# EAGLE board Qwiic-OpenLog-Panel (EAGLE 9.2.0), part 1 of 4
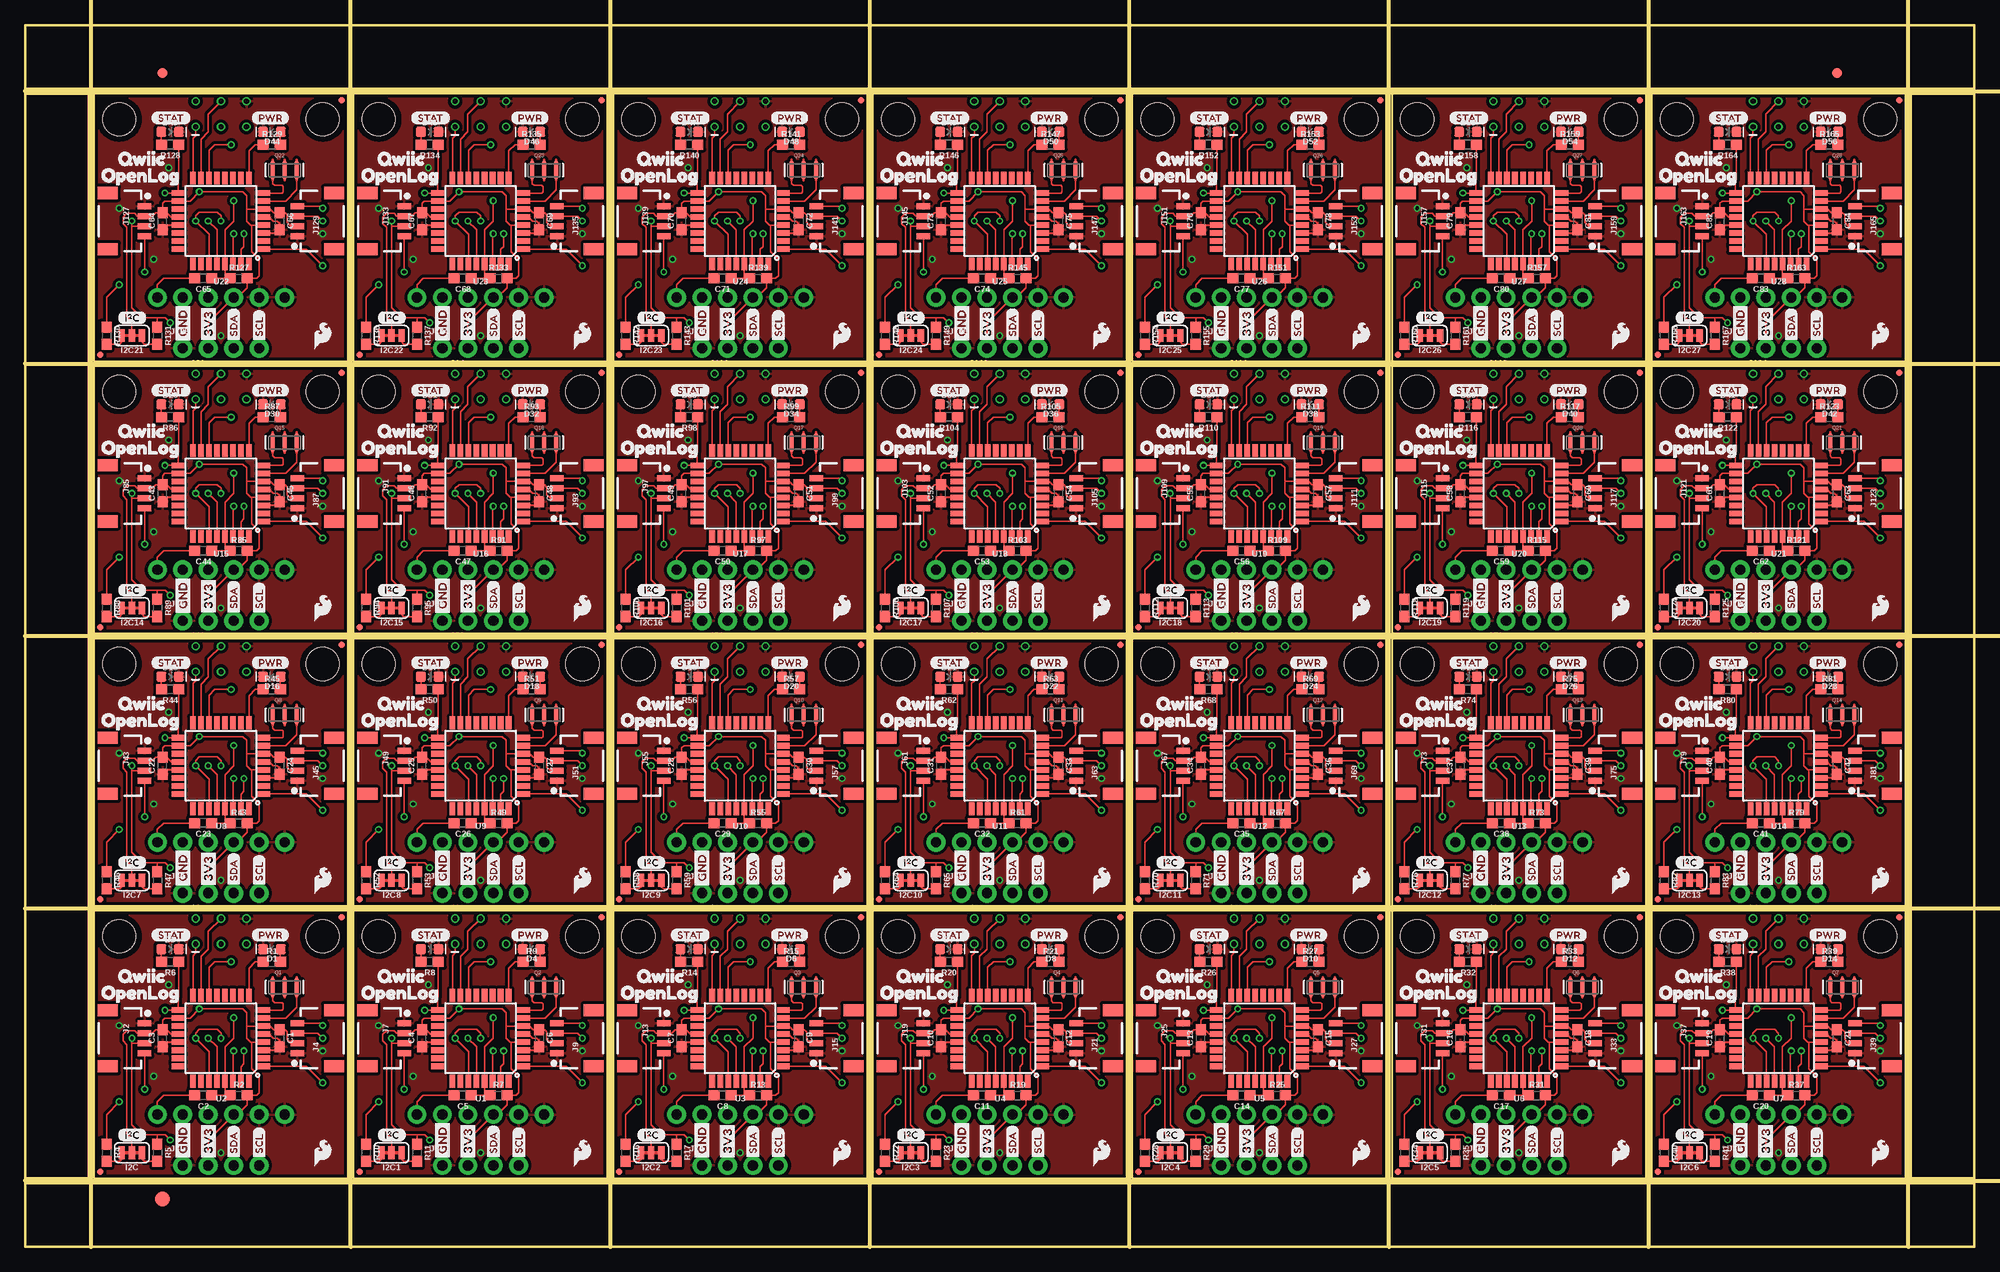
[diagram p0: board, top side]
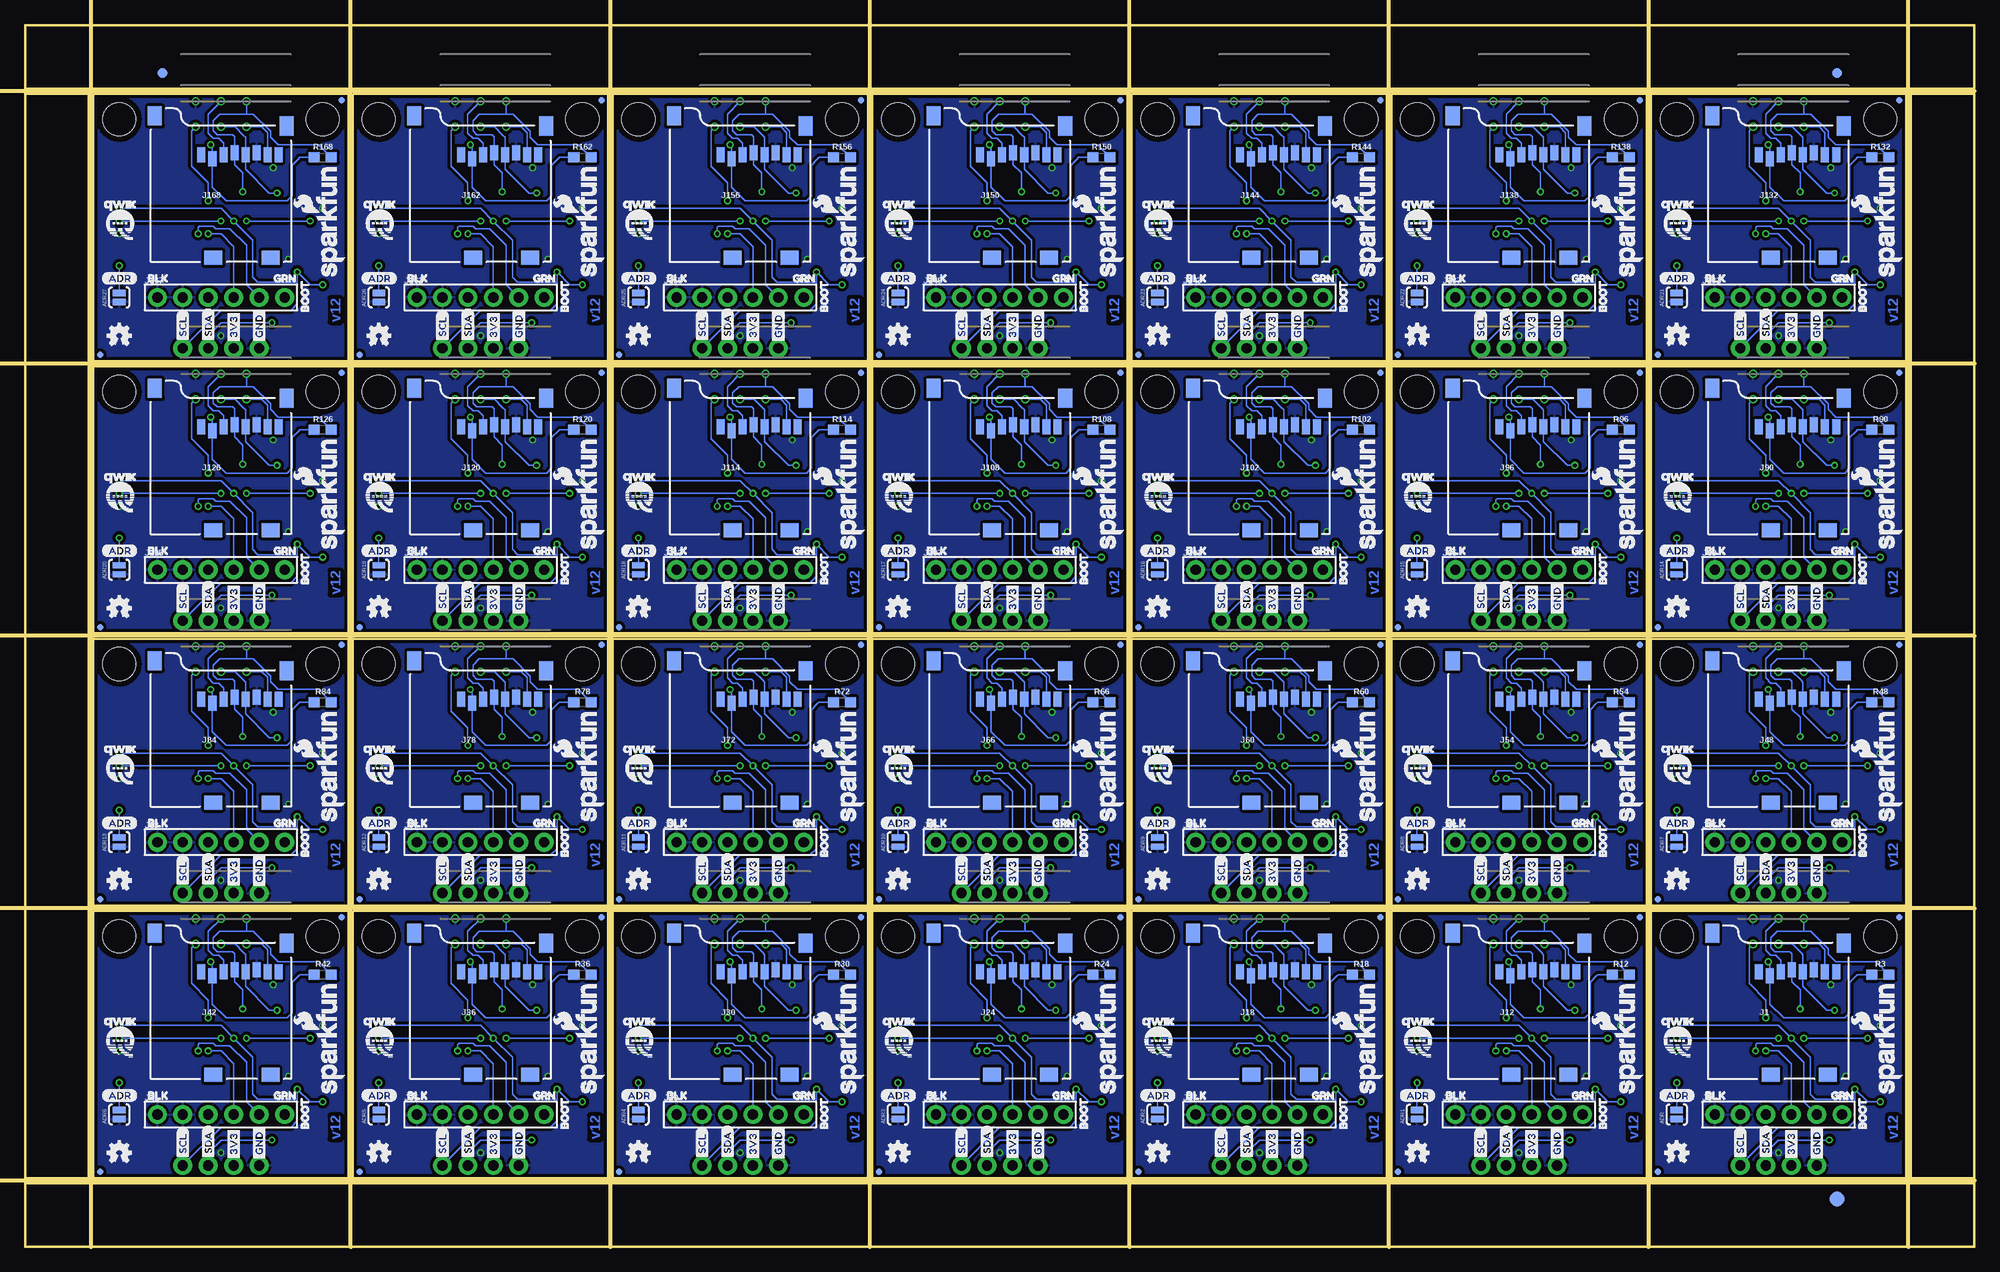
[diagram p1: board, bottom side, seen from below]

Size 194.56 x 121.92 mm. Coordinates in mm from the lower left corner, seen from the top.
Outline: 32.26,6.86 32.26,33.53 6.86,33.53 6.86,6.86 32.26,6.86
Outline: 58.17,6.86 58.17,33.53 32.77,33.53 32.77,6.86 58.17,6.86
Outline: 84.07,6.86 84.07,33.53 58.67,33.53 58.67,6.86 84.07,6.86
Outline: 109.98,6.86 109.98,33.53 84.58,33.53 84.58,6.86 109.98,6.86
Outline: 135.89,6.86 135.89,33.53 110.49,33.53 110.49,6.86 135.89,6.86
Outline: 161.8,6.86 161.8,33.53 136.4,33.53 136.4,6.86 161.8,6.86
Outline: 187.71,6.86 187.71,33.53 162.31,33.53 162.31,6.86 187.71,6.86
Outline: 32.26,34.04 32.26,60.71 6.86,60.71 6.86,34.04 32.26,34.04
Outline: 58.17,34.04 58.17,60.71 32.77,60.71 32.77,34.04 58.17,34.04
Outline: 84.07,34.04 84.07,60.71 58.67,60.71 58.67,34.04 84.07,34.04
Outline: 109.98,34.04 109.98,60.71 84.58,60.71 84.58,34.04 109.98,34.04
Outline: 135.89,34.04 135.89,60.71 110.49,60.71 110.49,34.04 135.89,34.04
Outline: 161.8,34.04 161.8,60.71 136.4,60.71 136.4,34.04 161.8,34.04
Outline: 187.71,34.04 187.71,60.71 162.31,60.71 162.31,34.04 187.71,34.04
Outline: 32.26,61.21 32.26,87.88 6.86,87.88 6.86,61.21 32.26,61.21
Outline: 58.17,61.21 58.17,87.88 32.77,87.88 32.77,61.21 58.17,61.21
Outline: 84.07,61.21 84.07,87.88 58.67,87.88 58.67,61.21 84.07,61.21
Outline: 109.98,61.21 109.98,87.88 84.58,87.88 84.58,61.21 109.98,61.21
Outline: 135.89,61.21 135.89,87.88 110.49,87.88 110.49,61.21 135.89,61.21
Outline: 161.8,61.21 161.8,87.88 136.4,87.88 136.4,61.21 161.8,61.21
Outline: 187.71,61.21 187.71,87.88 162.31,87.88 162.31,61.21 187.71,61.21
Outline: 32.26,88.39 32.26,115.06 6.86,115.06 6.86,88.39 32.26,88.39
Outline: 58.17,88.39 58.17,115.06 32.77,115.06 32.77,88.39 58.17,88.39
Outline: 84.07,88.39 84.07,115.06 58.67,115.06 58.67,88.39 84.07,88.39
Outline: 109.98,88.39 109.98,115.06 84.58,115.06 84.58,88.39 109.98,88.39
Outline: 135.89,88.39 135.89,115.06 110.49,115.06 110.49,88.39 135.89,88.39
Outline: 161.8,88.39 161.8,115.06 136.4,115.06 136.4,88.39 161.8,88.39
Outline: 187.71,88.39 187.71,115.06 162.31,115.06 162.31,88.39 187.71,88.39
Outline: 0,6.35 194.56,6.35 194.56,0 0,0 0,6.35
Outline: 188.21,115.06 194.56,115.06 194.56,6.86 188.21,6.86 188.21,115.06
Outline: 0,121.92 194.56,121.92 194.56,115.57 0,115.57 0,121.92
Outline: 0,115.06 6.35,115.06 6.35,6.86 0,6.86 0,115.06
Copper layers (1*16): Top 0.035mm / dielectric 1.5mm / Bottom 0.035mm
Design rules "SparkFun-2-layer-PCBWay-LIMIT": minimum track width 6mil, minimum drill 0.3mm, track to track 6mil, track to pad 6mil, pad to pad 6mil, via to via 6mil, smd to smd 6mil, copper to edge 6mil, drill to drill 6mil, minimum pad ring 6mil, minimum via ring 6mil, stop-mask expansion 4mil, vias tented up to drill 25mil, thermal gap 10mil
Net classes: 1 vcc: width 0.152 mm
Milling: 13 lines

## Footprints (pad centres in the part's own frame; a part is rotated, then mirrored left to right if it is on the bottom)
SJ_2S-NO = smd 0.635 x 1.27: 1 -0.45,0; 2 0.45,0
0603 = smd 1.1 x 1: 1 -0.85,0; 2 0.85,0
LED-0603 = smd 1 x 1: A -0.877,0; C 0.877,0
FIDUCIAL-1X2 = smd 1 x 1: 1 0,0
FIDUCIAL-1.5X3 = smd 1.5 x 1.5: 1 0,0
FIDUCIAL-MICRO = smd 0.635 x 0.635: 1 0,0
SMT-JUMPER_3_2-NC_TRACE_SILK = smd 0.635 x 1.27: 1 -1.016,0; 2 0,0; 3 1.016,0
MICRO-SD-SOCKET = smd 1.8 x 1.4: CD1 -2.05,0.4; CD2 -7.75,0.4 | smd 0.8 x 1.5: CS -7.84,10.3; DI -6.74,10.7; DO -2.34,10.7; GND -3.44,10.9; RSV1 -8.94,10.7; RSV2 -1.24,10.7; SCLK -4.54,10.7; VCC -5.64,10.9 | smd 1.4 x 1.9: GND1 -13.6,14.55; GND3 -0.45,13.55
1X04_1MM_RA = smd 0.6 x 1.35: 1 -1.5,0; 2 -0.5,0; 3 0.5,0; 4 1.5,0 | smd 1.2 x 2: NC1 2.8,-3.675; NC2 -2.8,-3.675
1X04_NO_SILK = drill 1.016 pad 1.88: 1 0,0; 2 2.54,0; 3 5.08,0; 4 7.62,0
2X3_TEST_POINTS = drill 0.508: 1 -2.54,-1.27; 2 -2.54,1.27; 3 0,-1.27; 4 0,1.27; 5 2.54,-1.27; 6 2.54,1.27
1X06_NO_SILK = drill 1.016 pad 1.88: 1 0,0; 2 2.54,0; 3 5.08,0; 4 7.62,0; 5 10.16,0; 6 12.7,0
STAND-OFF = hole 3.302: 0,0
RESONATOR-SMD = smd 0.45 x 1.905: 1 -1.2,0; 2 0,0; 3 1.2,0
TQFP32-08 = smd 1.27 x 0.559: 1 -4.293,2.8; 2 -4.293,2; 3 -4.293,1.2; 4 -4.293,0.4; 5 -4.293,-0.4; 6 -4.293,-1.2; 7 -4.293,-2; 8 -4.293,-2.8; 17 4.293,-2.8; 18 4.293,-2; 19 4.293,-1.2; 20 4.293,-0.4; 21 4.293,0.4; 22 4.293,1.2; 23 4.293,2; 24 4.293,2.8 | smd 0.559 x 1.27: 9 -2.8,-4.293; 10 -2,-4.293; 11 -1.2,-4.293; 12 -0.4,-4.293; 13 0.4,-4.293; 14 1.2,-4.293; 15 2,-4.293; 16 2.8,-4.293; 25 2.8,4.293; 26 2,4.293; 27 1.2,4.293; 28 0.4,4.293; 29 -0.4,4.293; 30 -1.2,4.293; 31 -2,4.293; 32 -2.8,4.293

## Placement (x,y rotation side)
ADR  [SJ_2S-NO]  29.72,13.21 90 bottom
ADR1  [SJ_2S-NO]  55.63,13.21 90 bottom
ADR2  [SJ_2S-NO]  81.53,13.21 90 bottom
ADR3  [SJ_2S-NO]  107.44,13.21 90 bottom
ADR4  [SJ_2S-NO]  133.35,13.21 90 bottom
ADR5  [SJ_2S-NO]  159.26,13.21 90 bottom
ADR6  [SJ_2S-NO]  185.17,13.21 90 bottom
ADR7  [SJ_2S-NO]  29.72,40.39 90 bottom
ADR8  [SJ_2S-NO]  55.63,40.39 90 bottom
ADR9  [SJ_2S-NO]  81.53,40.39 90 bottom
ADR10  [SJ_2S-NO]  107.44,40.39 90 bottom
ADR11  [SJ_2S-NO]  133.35,40.39 90 bottom
ADR12  [SJ_2S-NO]  159.26,40.39 90 bottom
ADR13  [SJ_2S-NO]  185.17,40.39 90 bottom
ADR14  [SJ_2S-NO]  29.72,67.56 90 bottom
ADR15  [SJ_2S-NO]  55.63,67.56 90 bottom
ADR16  [SJ_2S-NO]  81.53,67.56 90 bottom
ADR17  [SJ_2S-NO]  107.44,67.56 90 bottom
ADR18  [SJ_2S-NO]  133.35,67.56 90 bottom
ADR19  [SJ_2S-NO]  159.26,67.56 90 bottom
ADR20  [SJ_2S-NO]  185.17,67.56 90 bottom
ADR21  [SJ_2S-NO]  29.72,94.74 90 bottom
ADR22  [SJ_2S-NO]  55.63,94.74 90 bottom
ADR23  [SJ_2S-NO]  81.53,94.74 90 bottom
ADR24  [SJ_2S-NO]  107.44,94.74 90 bottom
ADR25  [SJ_2S-NO]  133.35,94.74 90 bottom
ADR26  [SJ_2S-NO]  159.26,94.74 90 bottom
ADR27  [SJ_2S-NO]  185.17,94.74 90 bottom
C1  4.7uF  [0603]  25.4,20.83 270 top
C2  0.1uF  [0603]  17.78,15.11 180 top
C3  0.1uF  [0603]  13.72,20.83 90 top
C4  0.1uF  [0603]  39.62,20.83 90 top
C5  0.1uF  [0603]  43.69,15.11 180 top
C6  4.7uF  [0603]  51.31,20.83 270 top
C7  0.1uF  [0603]  65.53,20.83 90 top
C8  0.1uF  [0603]  69.6,15.11 180 top
C9  4.7uF  [0603]  77.22,20.83 270 top
C10  0.1uF  [0603]  91.44,20.83 90 top
C11  0.1uF  [0603]  95.5,15.11 180 top
C12  4.7uF  [0603]  103.12,20.83 270 top
C13  0.1uF  [0603]  117.35,20.83 90 top
C14  0.1uF  [0603]  121.41,15.11 180 top
C15  4.7uF  [0603]  129.03,20.83 270 top
C16  0.1uF  [0603]  143.26,20.83 90 top
C17  0.1uF  [0603]  147.32,15.11 180 top
C18  4.7uF  [0603]  154.94,20.83 270 top
C19  0.1uF  [0603]  169.16,20.83 90 top
C20  0.1uF  [0603]  173.23,15.11 180 top
C21  4.7uF  [0603]  180.85,20.83 270 top
C22  0.1uF  [0603]  13.72,48.01 90 top
C23  0.1uF  [0603]  17.78,42.29 180 top
C24  4.7uF  [0603]  25.4,48.01 270 top
C25  0.1uF  [0603]  39.62,48.01 90 top
C26  0.1uF  [0603]  43.69,42.29 180 top
C27  4.7uF  [0603]  51.31,48.01 270 top
C28  0.1uF  [0603]  65.53,48.01 90 top
C29  0.1uF  [0603]  69.6,42.29 180 top
C30  4.7uF  [0603]  77.22,48.01 270 top
C31  0.1uF  [0603]  91.44,48.01 90 top
C32  0.1uF  [0603]  95.5,42.29 180 top
C33  4.7uF  [0603]  103.12,48.01 270 top
C34  0.1uF  [0603]  117.35,48.01 90 top
C35  0.1uF  [0603]  121.41,42.29 180 top
C36  4.7uF  [0603]  129.03,48.01 270 top
C37  0.1uF  [0603]  143.26,48.01 90 top
C38  0.1uF  [0603]  147.32,42.29 180 top
C39  4.7uF  [0603]  154.94,48.01 270 top
C40  0.1uF  [0603]  169.16,48.01 90 top
C41  0.1uF  [0603]  173.23,42.29 180 top
C42  4.7uF  [0603]  180.85,48.01 270 top
C43  0.1uF  [0603]  13.72,75.18 90 top
C44  0.1uF  [0603]  17.78,69.47 180 top
C45  4.7uF  [0603]  25.4,75.18 270 top
C46  0.1uF  [0603]  39.62,75.18 90 top
C47  0.1uF  [0603]  43.69,69.47 180 top
C48  4.7uF  [0603]  51.31,75.18 270 top
C49  0.1uF  [0603]  65.53,75.18 90 top
C50  0.1uF  [0603]  69.6,69.47 180 top
C51  4.7uF  [0603]  77.22,75.18 270 top
C52  0.1uF  [0603]  91.44,75.18 90 top
C53  0.1uF  [0603]  95.5,69.47 180 top
C54  4.7uF  [0603]  103.12,75.18 270 top
C55  0.1uF  [0603]  117.35,75.18 90 top
C56  0.1uF  [0603]  121.41,69.47 180 top
C57  4.7uF  [0603]  129.03,75.18 270 top
C58  0.1uF  [0603]  143.26,75.18 90 top
C59  0.1uF  [0603]  147.32,69.47 180 top
C60  4.7uF  [0603]  154.94,75.18 270 top
C61  0.1uF  [0603]  169.16,75.18 90 top
C62  0.1uF  [0603]  173.23,69.47 180 top
C63  4.7uF  [0603]  180.85,75.18 270 top
C64  0.1uF  [0603]  13.72,102.36 90 top
C65  0.1uF  [0603]  17.78,96.65 180 top
C66  4.7uF  [0603]  25.4,102.36 270 top
C67  0.1uF  [0603]  39.62,102.36 90 top
C68  0.1uF  [0603]  43.69,96.65 180 top
C69  4.7uF  [0603]  51.31,102.36 270 top
C70  0.1uF  [0603]  65.53,102.36 90 top
C71  0.1uF  [0603]  69.6,96.65 180 top
C72  4.7uF  [0603]  77.22,102.36 270 top
C73  0.1uF  [0603]  91.44,102.36 90 top
C74  0.1uF  [0603]  95.5,96.65 180 top
C75  4.7uF  [0603]  103.12,102.36 270 top
C76  0.1uF  [0603]  117.35,102.36 90 top
C77  0.1uF  [0603]  121.41,96.65 180 top
C78  4.7uF  [0603]  129.03,102.36 270 top
C79  0.1uF  [0603]  143.26,102.36 90 top
C80  0.1uF  [0603]  147.32,96.65 180 top
C81  4.7uF  [0603]  154.94,102.36 270 top
C82  0.1uF  [0603]  169.16,102.36 90 top
C83  0.1uF  [0603]  173.23,96.65 180 top
C84  4.7uF  [0603]  180.85,102.36 270 top
D1  RED  [LED-0603]  24.64,29.72 180 top
D2  GREEN  [LED-0603]  40.39,29.72 0 top
D3  GREEN  [LED-0603]  14.48,29.72 0 top
D4  RED  [LED-0603]  50.55,29.72 180 top
D5  GREEN  [LED-0603]  66.29,29.72 0 top
D6  RED  [LED-0603]  76.45,29.72 180 top
D7  GREEN  [LED-0603]  92.2,29.72 0 top
D8  RED  [LED-0603]  102.36,29.72 180 top
D9  GREEN  [LED-0603]  118.11,29.72 0 top
D10  RED  [LED-0603]  128.27,29.72 180 top
D11  GREEN  [LED-0603]  144.02,29.72 0 top
D12  RED  [LED-0603]  154.18,29.72 180 top
D13  GREEN  [LED-0603]  169.93,29.72 0 top
D14  RED  [LED-0603]  180.09,29.72 180 top
D15  GREEN  [LED-0603]  14.48,56.9 0 top
D16  RED  [LED-0603]  24.64,56.9 180 top
D17  GREEN  [LED-0603]  40.39,56.9 0 top
D18  RED  [LED-0603]  50.55,56.9 180 top
D19  GREEN  [LED-0603]  66.29,56.9 0 top
D20  RED  [LED-0603]  76.45,56.9 180 top
D21  GREEN  [LED-0603]  92.2,56.9 0 top
D22  RED  [LED-0603]  102.36,56.9 180 top
D23  GREEN  [LED-0603]  118.11,56.9 0 top
D24  RED  [LED-0603]  128.27,56.9 180 top
D25  GREEN  [LED-0603]  144.02,56.9 0 top
D26  RED  [LED-0603]  154.18,56.9 180 top
D27  GREEN  [LED-0603]  169.93,56.9 0 top
D28  RED  [LED-0603]  180.09,56.9 180 top
D29  GREEN  [LED-0603]  14.48,84.07 0 top
D30  RED  [LED-0603]  24.64,84.07 180 top
D31  GREEN  [LED-0603]  40.39,84.07 0 top
D32  RED  [LED-0603]  50.55,84.07 180 top
D33  GREEN  [LED-0603]  66.29,84.07 0 top
D34  RED  [LED-0603]  76.45,84.07 180 top
D35  GREEN  [LED-0603]  92.2,84.07 0 top
D36  RED  [LED-0603]  102.36,84.07 180 top
D37  GREEN  [LED-0603]  118.11,84.07 0 top
D38  RED  [LED-0603]  128.27,84.07 180 top
D39  GREEN  [LED-0603]  144.02,84.07 0 top
D40  RED  [LED-0603]  154.18,84.07 180 top
D41  GREEN  [LED-0603]  169.93,84.07 0 top
D42  RED  [LED-0603]  180.09,84.07 180 top
D43  GREEN  [LED-0603]  14.48,111.25 0 top
D44  RED  [LED-0603]  24.64,111.25 180 top
D45  GREEN  [LED-0603]  40.39,111.25 0 top
D46  RED  [LED-0603]  50.55,111.25 180 top
D47  GREEN  [LED-0603]  66.29,111.25 0 top
D48  RED  [LED-0603]  76.45,111.25 180 top
D49  GREEN  [LED-0603]  92.2,111.25 0 top
D50  RED  [LED-0603]  102.36,111.25 180 top
D51  GREEN  [LED-0603]  118.11,111.25 0 top
D52  RED  [LED-0603]  128.27,111.25 180 top
D53  GREEN  [LED-0603]  144.02,111.25 0 top
D54  RED  [LED-0603]  154.18,111.25 180 top
D55  GREEN  [LED-0603]  169.93,111.25 0 top
D56  RED  [LED-0603]  180.09,111.25 180 top
E$1  [FIDUCIAL-1X2]  13.72,117.16 0 top
E$2  [FIDUCIAL-1X2]  13.72,117.16 0 bottom
E$3  [FIDUCIAL-1X2]  180.85,117.16 0 top
E$4  [FIDUCIAL-1X2]  180.85,117.16 0 bottom
E$5  [FIDUCIAL-1.5X3]  13.72,4.76 0 top
E$6  [FIDUCIAL-1.5X3]  13.72,4.76 0 bottom
FID1  FIDUCIALUFIDUCIAL  [FIDUCIAL-MICRO]  31.62,32.89 0 top
FID2  FIDUCIALUFIDUCIAL  [FIDUCIAL-MICRO]  7.49,7.49 0 top
FID3  FIDUCIALUFIDUCIAL  [FIDUCIAL-MICRO]  31.62,7.49 180 bottom
FID4  FIDUCIALUFIDUCIAL  [FIDUCIAL-MICRO]  7.49,32.89 0 bottom
FID5  FIDUCIALUFIDUCIAL  [FIDUCIAL-MICRO]  57.53,32.89 0 top
FID6  FIDUCIALUFIDUCIAL  [FIDUCIAL-MICRO]  33.4,7.49 0 top
FID7  FIDUCIALUFIDUCIAL  [FIDUCIAL-MICRO]  57.53,7.49 180 bottom
FID8  FIDUCIALUFIDUCIAL  [FIDUCIAL-MICRO]  33.4,32.89 0 bottom
FID9  FIDUCIALUFIDUCIAL  [FIDUCIAL-MICRO]  83.44,32.89 0 top
FID10  FIDUCIALUFIDUCIAL  [FIDUCIAL-MICRO]  59.31,7.49 0 top
FID11  FIDUCIALUFIDUCIAL  [FIDUCIAL-MICRO]  83.44,7.49 180 bottom
FID12  FIDUCIALUFIDUCIAL  [FIDUCIAL-MICRO]  59.31,32.89 0 bottom
FID13  FIDUCIALUFIDUCIAL  [FIDUCIAL-MICRO]  109.35,32.89 0 top
FID14  FIDUCIALUFIDUCIAL  [FIDUCIAL-MICRO]  85.22,7.49 0 top
FID15  FIDUCIALUFIDUCIAL  [FIDUCIAL-MICRO]  109.35,7.49 180 bottom
FID16  FIDUCIALUFIDUCIAL  [FIDUCIAL-MICRO]  85.22,32.89 0 bottom
FID17  FIDUCIALUFIDUCIAL  [FIDUCIAL-MICRO]  135.25,32.89 0 top
FID18  FIDUCIALUFIDUCIAL  [FIDUCIAL-MICRO]  111.12,7.49 0 top
FID19  FIDUCIALUFIDUCIAL  [FIDUCIAL-MICRO]  135.25,7.49 180 bottom
FID20  FIDUCIALUFIDUCIAL  [FIDUCIAL-MICRO]  111.12,32.89 0 bottom
FID21  FIDUCIALUFIDUCIAL  [FIDUCIAL-MICRO]  161.16,32.89 0 top
FID22  FIDUCIALUFIDUCIAL  [FIDUCIAL-MICRO]  137.03,7.49 0 top
FID23  FIDUCIALUFIDUCIAL  [FIDUCIAL-MICRO]  161.16,7.49 180 bottom
FID24  FIDUCIALUFIDUCIAL  [FIDUCIAL-MICRO]  137.03,32.89 0 bottom
FID25  FIDUCIALUFIDUCIAL  [FIDUCIAL-MICRO]  187.07,32.89 0 top
FID26  FIDUCIALUFIDUCIAL  [FIDUCIAL-MICRO]  162.94,7.49 0 top
FID27  FIDUCIALUFIDUCIAL  [FIDUCIAL-MICRO]  187.07,7.49 180 bottom
FID28  FIDUCIALUFIDUCIAL  [FIDUCIAL-MICRO]  162.94,32.89 0 bottom
FID29  FIDUCIALUFIDUCIAL  [FIDUCIAL-MICRO]  31.62,60.07 0 top
FID30  FIDUCIALUFIDUCIAL  [FIDUCIAL-MICRO]  7.49,34.67 0 top
FID31  FIDUCIALUFIDUCIAL  [FIDUCIAL-MICRO]  31.62,34.67 180 bottom
FID32  FIDUCIALUFIDUCIAL  [FIDUCIAL-MICRO]  7.49,60.07 0 bottom
FID33  FIDUCIALUFIDUCIAL  [FIDUCIAL-MICRO]  57.53,60.07 0 top
FID34  FIDUCIALUFIDUCIAL  [FIDUCIAL-MICRO]  33.4,34.67 0 top
FID35  FIDUCIALUFIDUCIAL  [FIDUCIAL-MICRO]  57.53,34.67 180 bottom
FID36  FIDUCIALUFIDUCIAL  [FIDUCIAL-MICRO]  33.4,60.07 0 bottom
FID37  FIDUCIALUFIDUCIAL  [FIDUCIAL-MICRO]  83.44,60.07 0 top
FID38  FIDUCIALUFIDUCIAL  [FIDUCIAL-MICRO]  59.31,34.67 0 top
FID39  FIDUCIALUFIDUCIAL  [FIDUCIAL-MICRO]  83.44,34.67 180 bottom
FID40  FIDUCIALUFIDUCIAL  [FIDUCIAL-MICRO]  59.31,60.07 0 bottom
FID41  FIDUCIALUFIDUCIAL  [FIDUCIAL-MICRO]  109.35,60.07 0 top
FID42  FIDUCIALUFIDUCIAL  [FIDUCIAL-MICRO]  85.22,34.67 0 top
FID43  FIDUCIALUFIDUCIAL  [FIDUCIAL-MICRO]  109.35,34.67 180 bottom
FID44  FIDUCIALUFIDUCIAL  [FIDUCIAL-MICRO]  85.22,60.07 0 bottom
FID45  FIDUCIALUFIDUCIAL  [FIDUCIAL-MICRO]  135.25,60.07 0 top
FID46  FIDUCIALUFIDUCIAL  [FIDUCIAL-MICRO]  111.12,34.67 0 top
FID47  FIDUCIALUFIDUCIAL  [FIDUCIAL-MICRO]  135.25,34.67 180 bottom
FID48  FIDUCIALUFIDUCIAL  [FIDUCIAL-MICRO]  111.12,60.07 0 bottom
FID49  FIDUCIALUFIDUCIAL  [FIDUCIAL-MICRO]  161.16,60.07 0 top
FID50  FIDUCIALUFIDUCIAL  [FIDUCIAL-MICRO]  137.03,34.67 0 top
FID51  FIDUCIALUFIDUCIAL  [FIDUCIAL-MICRO]  161.16,34.67 180 bottom
FID52  FIDUCIALUFIDUCIAL  [FIDUCIAL-MICRO]  137.03,60.07 0 bottom
FID53  FIDUCIALUFIDUCIAL  [FIDUCIAL-MICRO]  187.07,60.07 0 top
FID54  FIDUCIALUFIDUCIAL  [FIDUCIAL-MICRO]  162.94,34.67 0 top
FID55  FIDUCIALUFIDUCIAL  [FIDUCIAL-MICRO]  187.07,34.67 180 bottom
FID56  FIDUCIALUFIDUCIAL  [FIDUCIAL-MICRO]  162.94,60.07 0 bottom
FID57  FIDUCIALUFIDUCIAL  [FIDUCIAL-MICRO]  31.62,87.25 0 top
FID58  FIDUCIALUFIDUCIAL  [FIDUCIAL-MICRO]  7.49,61.85 0 top
FID59  FIDUCIALUFIDUCIAL  [FIDUCIAL-MICRO]  31.62,61.85 180 bottom
FID60  FIDUCIALUFIDUCIAL  [FIDUCIAL-MICRO]  7.49,87.25 0 bottom
FID61  FIDUCIALUFIDUCIAL  [FIDUCIAL-MICRO]  57.53,87.25 0 top
FID62  FIDUCIALUFIDUCIAL  [FIDUCIAL-MICRO]  33.4,61.85 0 top
FID63  FIDUCIALUFIDUCIAL  [FIDUCIAL-MICRO]  57.53,61.85 180 bottom
FID64  FIDUCIALUFIDUCIAL  [FIDUCIAL-MICRO]  33.4,87.25 0 bottom
FID65  FIDUCIALUFIDUCIAL  [FIDUCIAL-MICRO]  83.44,87.25 0 top
FID66  FIDUCIALUFIDUCIAL  [FIDUCIAL-MICRO]  59.31,61.85 0 top
FID67  FIDUCIALUFIDUCIAL  [FIDUCIAL-MICRO]  83.44,61.85 180 bottom
FID68  FIDUCIALUFIDUCIAL  [FIDUCIAL-MICRO]  59.31,87.25 0 bottom
FID69  FIDUCIALUFIDUCIAL  [FIDUCIAL-MICRO]  109.35,87.25 0 top
FID70  FIDUCIALUFIDUCIAL  [FIDUCIAL-MICRO]  85.22,61.85 0 top
FID71  FIDUCIALUFIDUCIAL  [FIDUCIAL-MICRO]  109.35,61.85 180 bottom
FID72  FIDUCIALUFIDUCIAL  [FIDUCIAL-MICRO]  85.22,87.25 0 bottom
FID73  FIDUCIALUFIDUCIAL  [FIDUCIAL-MICRO]  135.25,87.25 0 top
FID74  FIDUCIALUFIDUCIAL  [FIDUCIAL-MICRO]  111.12,61.85 0 top
FID75  FIDUCIALUFIDUCIAL  [FIDUCIAL-MICRO]  135.25,61.85 180 bottom
FID76  FIDUCIALUFIDUCIAL  [FIDUCIAL-MICRO]  111.12,87.25 0 bottom
FID77  FIDUCIALUFIDUCIAL  [FIDUCIAL-MICRO]  161.16,87.25 0 top
FID78  FIDUCIALUFIDUCIAL  [FIDUCIAL-MICRO]  137.03,61.85 0 top
FID79  FIDUCIALUFIDUCIAL  [FIDUCIAL-MICRO]  161.16,61.85 180 bottom
FID80  FIDUCIALUFIDUCIAL  [FIDUCIAL-MICRO]  137.03,87.25 0 bottom
FID81  FIDUCIALUFIDUCIAL  [FIDUCIAL-MICRO]  187.07,87.25 0 top
FID82  FIDUCIALUFIDUCIAL  [FIDUCIAL-MICRO]  162.94,61.85 0 top
FID83  FIDUCIALUFIDUCIAL  [FIDUCIAL-MICRO]  187.07,61.85 180 bottom
FID84  FIDUCIALUFIDUCIAL  [FIDUCIAL-MICRO]  162.94,87.25 0 bottom
FID85  FIDUCIALUFIDUCIAL  [FIDUCIAL-MICRO]  31.62,114.43 0 top
FID86  FIDUCIALUFIDUCIAL  [FIDUCIAL-MICRO]  7.49,89.03 0 top
FID87  FIDUCIALUFIDUCIAL  [FIDUCIAL-MICRO]  31.62,89.03 180 bottom
FID88  FIDUCIALUFIDUCIAL  [FIDUCIAL-MICRO]  7.49,114.43 0 bottom
FID89  FIDUCIALUFIDUCIAL  [FIDUCIAL-MICRO]  57.53,114.43 0 top
FID90  FIDUCIALUFIDUCIAL  [FIDUCIAL-MICRO]  33.4,89.03 0 top
FID91  FIDUCIALUFIDUCIAL  [FIDUCIAL-MICRO]  57.53,89.03 180 bottom
FID92  FIDUCIALUFIDUCIAL  [FIDUCIAL-MICRO]  33.4,114.43 0 bottom
FID93  FIDUCIALUFIDUCIAL  [FIDUCIAL-MICRO]  83.44,114.43 0 top
FID94  FIDUCIALUFIDUCIAL  [FIDUCIAL-MICRO]  59.31,89.03 0 top
FID95  FIDUCIALUFIDUCIAL  [FIDUCIAL-MICRO]  83.44,89.03 180 bottom
FID96  FIDUCIALUFIDUCIAL  [FIDUCIAL-MICRO]  59.31,114.43 0 bottom
FID97  FIDUCIALUFIDUCIAL  [FIDUCIAL-MICRO]  109.35,114.43 0 top
FID98  FIDUCIALUFIDUCIAL  [FIDUCIAL-MICRO]  85.22,89.03 0 top
FID99  FIDUCIALUFIDUCIAL  [FIDUCIAL-MICRO]  109.35,89.03 180 bottom
FID100  FIDUCIALUFIDUCIAL  [FIDUCIAL-MICRO]  85.22,114.43 0 bottom
FID101  FIDUCIALUFIDUCIAL  [FIDUCIAL-MICRO]  135.25,114.43 0 top
FID102  FIDUCIALUFIDUCIAL  [FIDUCIAL-MICRO]  111.12,89.03 0 top
FID103  FIDUCIALUFIDUCIAL  [FIDUCIAL-MICRO]  135.25,89.03 180 bottom
FID104  FIDUCIALUFIDUCIAL  [FIDUCIAL-MICRO]  111.12,114.43 0 bottom
FID105  FIDUCIALUFIDUCIAL  [FIDUCIAL-MICRO]  161.16,114.43 0 top
FID106  FIDUCIALUFIDUCIAL  [FIDUCIAL-MICRO]  137.03,89.03 0 top
FID107  FIDUCIALUFIDUCIAL  [FIDUCIAL-MICRO]  161.16,89.03 180 bottom
FID108  FIDUCIALUFIDUCIAL  [FIDUCIAL-MICRO]  137.03,114.43 0 bottom
FID109  FIDUCIALUFIDUCIAL  [FIDUCIAL-MICRO]  187.07,114.43 0 top
FID110  FIDUCIALUFIDUCIAL  [FIDUCIAL-MICRO]  162.94,89.03 0 top
FID111  FIDUCIALUFIDUCIAL  [FIDUCIAL-MICRO]  187.07,89.03 180 bottom
FID112  FIDUCIALUFIDUCIAL  [FIDUCIAL-MICRO]  162.94,114.43 0 bottom
I2C  [SMT-JUMPER_3_2-NC_TRACE_SILK]  10.67,9.4 180 top
I2C1  [SMT-JUMPER_3_2-NC_TRACE_SILK]  36.58,9.4 180 top
I2C2  [SMT-JUMPER_3_2-NC_TRACE_SILK]  62.48,9.4 180 top
I2C3  [SMT-JUMPER_3_2-NC_TRACE_SILK]  88.39,9.4 180 top
I2C4  [SMT-JUMPER_3_2-NC_TRACE_SILK]  114.3,9.4 180 top
I2C5  [SMT-JUMPER_3_2-NC_TRACE_SILK]  140.21,9.4 180 top
I2C6  [SMT-JUMPER_3_2-NC_TRACE_SILK]  166.12,9.4 180 top
I2C7  [SMT-JUMPER_3_2-NC_TRACE_SILK]  10.67,36.58 180 top
I2C8  [SMT-JUMPER_3_2-NC_TRACE_SILK]  36.58,36.58 180 top
I2C9  [SMT-JUMPER_3_2-NC_TRACE_SILK]  62.48,36.58 180 top
I2C10  [SMT-JUMPER_3_2-NC_TRACE_SILK]  88.39,36.58 180 top
I2C11  [SMT-JUMPER_3_2-NC_TRACE_SILK]  114.3,36.58 180 top
I2C12  [SMT-JUMPER_3_2-NC_TRACE_SILK]  140.21,36.58 180 top
I2C13  [SMT-JUMPER_3_2-NC_TRACE_SILK]  166.12,36.58 180 top
I2C14  [SMT-JUMPER_3_2-NC_TRACE_SILK]  10.67,63.75 180 top
I2C15  [SMT-JUMPER_3_2-NC_TRACE_SILK]  36.58,63.75 180 top
I2C16  [SMT-JUMPER_3_2-NC_TRACE_SILK]  62.48,63.75 180 top
I2C17  [SMT-JUMPER_3_2-NC_TRACE_SILK]  88.39,63.75 180 top
I2C18  [SMT-JUMPER_3_2-NC_TRACE_SILK]  114.3,63.75 180 top
I2C19  [SMT-JUMPER_3_2-NC_TRACE_SILK]  140.21,63.75 180 top
I2C20  [SMT-JUMPER_3_2-NC_TRACE_SILK]  166.12,63.75 180 top
I2C21  [SMT-JUMPER_3_2-NC_TRACE_SILK]  10.67,90.93 180 top
I2C22  [SMT-JUMPER_3_2-NC_TRACE_SILK]  36.58,90.93 180 top
I2C23  [SMT-JUMPER_3_2-NC_TRACE_SILK]  62.48,90.93 180 top
I2C24  [SMT-JUMPER_3_2-NC_TRACE_SILK]  88.39,90.93 180 top
I2C25  [SMT-JUMPER_3_2-NC_TRACE_SILK]  114.3,90.93 180 top
I2C26  [SMT-JUMPER_3_2-NC_TRACE_SILK]  140.21,90.93 180 top
I2C27  [SMT-JUMPER_3_2-NC_TRACE_SILK]  166.12,90.93 180 top
J1  MICRO-SD  [MICRO-SD-SOCKET]  12.57,16.76 0 bottom
J2  SMD  [1X04_1MM_RA]  11.94,20.83 270 top
J3  PTH  [1X04_NO_SILK]  15.75,8.13 0 top
J4  SMD  [1X04_1MM_RA]  27.18,20.83 90 top
J5  ISP  [2X3_TEST_POINTS]  19.56,31.5 0 top
J6  [1X06_NO_SILK]  25.91,13.21 0 bottom
J7  SMD  [1X04_1MM_RA]  37.85,20.83 270 top
J8  PTH  [1X04_NO_SILK]  41.66,8.13 0 top
J9  SMD  [1X04_1MM_RA]  53.09,20.83 90 top
J10  ISP  [2X3_TEST_POINTS]  45.47,31.5 0 top
J11  [1X06_NO_SILK]  51.82,13.21 0 bottom
J12  MICRO-SD  [MICRO-SD-SOCKET]  38.48,16.76 0 bottom
J13  SMD  [1X04_1MM_RA]  63.75,20.83 270 top
J14  PTH  [1X04_NO_SILK]  67.56,8.13 0 top
J15  SMD  [1X04_1MM_RA]  78.99,20.83 90 top
J16  ISP  [2X3_TEST_POINTS]  71.37,31.5 0 top
J17  [1X06_NO_SILK]  77.72,13.21 0 bottom
J18  MICRO-SD  [MICRO-SD-SOCKET]  64.39,16.76 0 bottom
J19  SMD  [1X04_1MM_RA]  89.66,20.83 270 top
J20  PTH  [1X04_NO_SILK]  93.47,8.13 0 top
J21  SMD  [1X04_1MM_RA]  104.9,20.83 90 top
J22  ISP  [2X3_TEST_POINTS]  97.28,31.5 0 top
J23  [1X06_NO_SILK]  103.63,13.21 0 bottom
J24  MICRO-SD  [MICRO-SD-SOCKET]  90.3,16.76 0 bottom
J25  SMD  [1X04_1MM_RA]  115.57,20.83 270 top
J26  PTH  [1X04_NO_SILK]  119.38,8.13 0 top
J27  SMD  [1X04_1MM_RA]  130.81,20.83 90 top
J28  ISP  [2X3_TEST_POINTS]  123.19,31.5 0 top
J29  [1X06_NO_SILK]  129.54,13.21 0 bottom
J30  MICRO-SD  [MICRO-SD-SOCKET]  116.2,16.76 0 bottom
J31  SMD  [1X04_1MM_RA]  141.48,20.83 270 top
J32  PTH  [1X04_NO_SILK]  145.29,8.13 0 top
J33  SMD  [1X04_1MM_RA]  156.72,20.83 90 top
J34  ISP  [2X3_TEST_POINTS]  149.1,31.5 0 top
J35  [1X06_NO_SILK]  155.45,13.21 0 bottom
J36  MICRO-SD  [MICRO-SD-SOCKET]  142.11,16.76 0 bottom
J37  SMD  [1X04_1MM_RA]  167.39,20.83 270 top
J38  PTH  [1X04_NO_SILK]  171.2,8.13 0 top
J39  SMD  [1X04_1MM_RA]  182.63,20.83 90 top
J40  ISP  [2X3_TEST_POINTS]  175.01,31.5 0 top
J41  [1X06_NO_SILK]  181.36,13.21 0 bottom
J42  MICRO-SD  [MICRO-SD-SOCKET]  168.02,16.76 0 bottom
J43  SMD  [1X04_1MM_RA]  11.94,48.01 270 top
J44  PTH  [1X04_NO_SILK]  15.75,35.31 0 top
J45  SMD  [1X04_1MM_RA]  27.18,48.01 90 top
J46  ISP  [2X3_TEST_POINTS]  19.56,58.67 0 top
J47  [1X06_NO_SILK]  25.91,40.39 0 bottom
J48  MICRO-SD  [MICRO-SD-SOCKET]  12.57,43.94 0 bottom
J49  SMD  [1X04_1MM_RA]  37.85,48.01 270 top
J50  PTH  [1X04_NO_SILK]  41.66,35.31 0 top
J51  SMD  [1X04_1MM_RA]  53.09,48.01 90 top
J52  ISP  [2X3_TEST_POINTS]  45.47,58.67 0 top
J53  [1X06_NO_SILK]  51.82,40.39 0 bottom
J54  MICRO-SD  [MICRO-SD-SOCKET]  38.48,43.94 0 bottom
J55  SMD  [1X04_1MM_RA]  63.75,48.01 270 top
J56  PTH  [1X04_NO_SILK]  67.56,35.31 0 top
J57  SMD  [1X04_1MM_RA]  78.99,48.01 90 top
J58  ISP  [2X3_TEST_POINTS]  71.37,58.67 0 top
J59  [1X06_NO_SILK]  77.72,40.39 0 bottom
J60  MICRO-SD  [MICRO-SD-SOCKET]  64.39,43.94 0 bottom
J61  SMD  [1X04_1MM_RA]  89.66,48.01 270 top
J62  PTH  [1X04_NO_SILK]  93.47,35.31 0 top
J63  SMD  [1X04_1MM_RA]  104.9,48.01 90 top
J64  ISP  [2X3_TEST_POINTS]  97.28,58.67 0 top
J65  [1X06_NO_SILK]  103.63,40.39 0 bottom
J66  MICRO-SD  [MICRO-SD-SOCKET]  90.3,43.94 0 bottom
J67  SMD  [1X04_1MM_RA]  115.57,48.01 270 top
J68  PTH  [1X04_NO_SILK]  119.38,35.31 0 top
J69  SMD  [1X04_1MM_RA]  130.81,48.01 90 top
J70  ISP  [2X3_TEST_POINTS]  123.19,58.67 0 top
J71  [1X06_NO_SILK]  129.54,40.39 0 bottom
J72  MICRO-SD  [MICRO-SD-SOCKET]  116.2,43.94 0 bottom
J73  SMD  [1X04_1MM_RA]  141.48,48.01 270 top
J74  PTH  [1X04_NO_SILK]  145.29,35.31 0 top
J75  SMD  [1X04_1MM_RA]  156.72,48.01 90 top
J76  ISP  [2X3_TEST_POINTS]  149.1,58.67 0 top
J77  [1X06_NO_SILK]  155.45,40.39 0 bottom
J78  MICRO-SD  [MICRO-SD-SOCKET]  142.11,43.94 0 bottom
J79  SMD  [1X04_1MM_RA]  167.39,48.01 270 top
J80  PTH  [1X04_NO_SILK]  171.2,35.31 0 top
J81  SMD  [1X04_1MM_RA]  182.63,48.01 90 top
J82  ISP  [2X3_TEST_POINTS]  175.01,58.67 0 top
J83  [1X06_NO_SILK]  181.36,40.39 0 bottom
J84  MICRO-SD  [MICRO-SD-SOCKET]  168.02,43.94 0 bottom
J85  SMD  [1X04_1MM_RA]  11.94,75.18 270 top
J86  PTH  [1X04_NO_SILK]  15.75,62.48 0 top
J87  SMD  [1X04_1MM_RA]  27.18,75.18 90 top
J88  ISP  [2X3_TEST_POINTS]  19.56,85.85 0 top
J89  [1X06_NO_SILK]  25.91,67.56 0 bottom
J90  MICRO-SD  [MICRO-SD-SOCKET]  12.57,71.12 0 bottom
J91  SMD  [1X04_1MM_RA]  37.85,75.18 270 top
J92  PTH  [1X04_NO_SILK]  41.66,62.48 0 top
J93  SMD  [1X04_1MM_RA]  53.09,75.18 90 top
J94  ISP  [2X3_TEST_POINTS]  45.47,85.85 0 top
J95  [1X06_NO_SILK]  51.82,67.56 0 bottom
J96  MICRO-SD  [MICRO-SD-SOCKET]  38.48,71.12 0 bottom
J97  SMD  [1X04_1MM_RA]  63.75,75.18 270 top
J98  PTH  [1X04_NO_SILK]  67.56,62.48 0 top
J99  SMD  [1X04_1MM_RA]  78.99,75.18 90 top
J100  ISP  [2X3_TEST_POINTS]  71.37,85.85 0 top
J101  [1X06_NO_SILK]  77.72,67.56 0 bottom
J102  MICRO-SD  [MICRO-SD-SOCKET]  64.39,71.12 0 bottom
J103  SMD  [1X04_1MM_RA]  89.66,75.18 270 top
J104  PTH  [1X04_NO_SILK]  93.47,62.48 0 top
J105  SMD  [1X04_1MM_RA]  104.9,75.18 90 top
J106  ISP  [2X3_TEST_POINTS]  97.28,85.85 0 top
J107  [1X06_NO_SILK]  103.63,67.56 0 bottom
J108  MICRO-SD  [MICRO-SD-SOCKET]  90.3,71.12 0 bottom
J109  SMD  [1X04_1MM_RA]  115.57,75.18 270 top
J110  PTH  [1X04_NO_SILK]  119.38,62.48 0 top
J111  SMD  [1X04_1MM_RA]  130.81,75.18 90 top
J112  ISP  [2X3_TEST_POINTS]  123.19,85.85 0 top
J113  [1X06_NO_SILK]  129.54,67.56 0 bottom
J114  MICRO-SD  [MICRO-SD-SOCKET]  116.2,71.12 0 bottom
J115  SMD  [1X04_1MM_RA]  141.48,75.18 270 top
J116  PTH  [1X04_NO_SILK]  145.29,62.48 0 top
J117  SMD  [1X04_1MM_RA]  156.72,75.18 90 top
J118  ISP  [2X3_TEST_POINTS]  149.1,85.85 0 top
J119  [1X06_NO_SILK]  155.45,67.56 0 bottom
J120  MICRO-SD  [MICRO-SD-SOCKET]  142.11,71.12 0 bottom
J121  SMD  [1X04_1MM_RA]  167.39,75.18 270 top
J122  PTH  [1X04_NO_SILK]  171.2,62.48 0 top
J123  SMD  [1X04_1MM_RA]  182.63,75.18 90 top
J124  ISP  [2X3_TEST_POINTS]  175.01,85.85 0 top
J125  [1X06_NO_SILK]  181.36,67.56 0 bottom
J126  MICRO-SD  [MICRO-SD-SOCKET]  168.02,71.12 0 bottom
J127  SMD  [1X04_1MM_RA]  11.94,102.36 270 top
J128  PTH  [1X04_NO_SILK]  15.75,89.66 0 top
J129  SMD  [1X04_1MM_RA]  27.18,102.36 90 top
J130  ISP  [2X3_TEST_POINTS]  19.56,113.03 0 top
J131  [1X06_NO_SILK]  25.91,94.74 0 bottom
J132  MICRO-SD  [MICRO-SD-SOCKET]  12.57,98.3 0 bottom
J133  SMD  [1X04_1MM_RA]  37.85,102.36 270 top
J134  PTH  [1X04_NO_SILK]  41.66,89.66 0 top
J135  SMD  [1X04_1MM_RA]  53.09,102.36 90 top
J136  ISP  [2X3_TEST_POINTS]  45.47,113.03 0 top
J137  [1X06_NO_SILK]  51.82,94.74 0 bottom
J138  MICRO-SD  [MICRO-SD-SOCKET]  38.48,98.3 0 bottom
J139  SMD  [1X04_1MM_RA]  63.75,102.36 270 top
J140  PTH  [1X04_NO_SILK]  67.56,89.66 0 top
J141  SMD  [1X04_1MM_RA]  78.99,102.36 90 top
J142  ISP  [2X3_TEST_POINTS]  71.37,113.03 0 top
J143  [1X06_NO_SILK]  77.72,94.74 0 bottom
J144  MICRO-SD  [MICRO-SD-SOCKET]  64.39,98.3 0 bottom
J145  SMD  [1X04_1MM_RA]  89.66,102.36 270 top
J146  PTH  [1X04_NO_SILK]  93.47,89.66 0 top
J147  SMD  [1X04_1MM_RA]  104.9,102.36 90 top
J148  ISP  [2X3_TEST_POINTS]  97.28,113.03 0 top
J149  [1X06_NO_SILK]  103.63,94.74 0 bottom
J150  MICRO-SD  [MICRO-SD-SOCKET]  90.3,98.3 0 bottom
J151  SMD  [1X04_1MM_RA]  115.57,102.36 270 top
J152  PTH  [1X04_NO_SILK]  119.38,89.66 0 top
J153  SMD  [1X04_1MM_RA]  130.81,102.36 90 top
J154  ISP  [2X3_TEST_POINTS]  123.19,113.03 0 top
J155  [1X06_NO_SILK]  129.54,94.74 0 bottom
J156  MICRO-SD  [MICRO-SD-SOCKET]  116.2,98.3 0 bottom
J157  SMD  [1X04_1MM_RA]  141.48,102.36 270 top
J158  PTH  [1X04_NO_SILK]  145.29,89.66 0 top
J159  SMD  [1X04_1MM_RA]  156.72,102.36 90 top
J160  ISP  [2X3_TEST_POINTS]  149.1,113.03 0 top
J161  [1X06_NO_SILK]  155.45,94.74 0 bottom
J162  MICRO-SD  [MICRO-SD-SOCKET]  142.11,98.3 0 bottom
J163  SMD  [1X04_1MM_RA]  167.39,102.36 270 top
J164  PTH  [1X04_NO_SILK]  171.2,89.66 0 top
J165  SMD  [1X04_1MM_RA]  182.63,102.36 90 top
J166  ISP  [2X3_TEST_POINTS]  175.01,113.03 0 top
J167  [1X06_NO_SILK]  181.36,94.74 0 bottom
J168  MICRO-SD  [MICRO-SD-SOCKET]  168.02,98.3 0 bottom
JP1  STAND-OFF  [STAND-OFF]  35.31,30.99 0 top
JP2  STAND-OFF  [STAND-OFF]  55.63,30.99 0 top
JP3  STAND-OFF  [STAND-OFF]  9.4,30.99 0 top
JP4  STAND-OFF  [STAND-OFF]  29.72,30.99 0 top
JP5  STAND-OFF  [STAND-OFF]  61.21,30.99 0 top
JP6  STAND-OFF  [STAND-OFF]  81.53,30.99 0 top
JP7  STAND-OFF  [STAND-OFF]  87.12,30.99 0 top
JP8  STAND-OFF  [STAND-OFF]  107.44,30.99 0 top
JP9  STAND-OFF  [STAND-OFF]  113.03,30.99 0 top
JP10  STAND-OFF  [STAND-OFF]  133.35,30.99 0 top
JP11  STAND-OFF  [STAND-OFF]  138.94,30.99 0 top
JP12  STAND-OFF  [STAND-OFF]  159.26,30.99 0 top
JP13  STAND-OFF  [STAND-OFF]  164.85,30.99 0 top
JP14  STAND-OFF  [STAND-OFF]  185.17,30.99 0 top
JP15  STAND-OFF  [STAND-OFF]  9.4,58.17 0 top
JP16  STAND-OFF  [STAND-OFF]  29.72,58.17 0 top
JP17  STAND-OFF  [STAND-OFF]  35.31,58.17 0 top
JP18  STAND-OFF  [STAND-OFF]  55.63,58.17 0 top
JP19  STAND-OFF  [STAND-OFF]  61.21,58.17 0 top
JP20  STAND-OFF  [STAND-OFF]  81.53,58.17 0 top
JP21  STAND-OFF  [STAND-OFF]  87.12,58.17 0 top
JP22  STAND-OFF  [STAND-OFF]  107.44,58.17 0 top
JP23  STAND-OFF  [STAND-OFF]  113.03,58.17 0 top
JP24  STAND-OFF  [STAND-OFF]  133.35,58.17 0 top
JP25  STAND-OFF  [STAND-OFF]  138.94,58.17 0 top
JP26  STAND-OFF  [STAND-OFF]  159.26,58.17 0 top
JP27  STAND-OFF  [STAND-OFF]  164.85,58.17 0 top
JP28  STAND-OFF  [STAND-OFF]  185.17,58.17 0 top
JP29  STAND-OFF  [STAND-OFF]  9.4,85.34 0 top
JP30  STAND-OFF  [STAND-OFF]  29.72,85.34 0 top
JP31  STAND-OFF  [STAND-OFF]  35.31,85.34 0 top
JP32  STAND-OFF  [STAND-OFF]  55.63,85.34 0 top
JP33  STAND-OFF  [STAND-OFF]  61.21,85.34 0 top
JP34  STAND-OFF  [STAND-OFF]  81.53,85.34 0 top
JP35  STAND-OFF  [STAND-OFF]  87.12,85.34 0 top
JP36  STAND-OFF  [STAND-OFF]  107.44,85.34 0 top
JP37  STAND-OFF  [STAND-OFF]  113.03,85.34 0 top
JP38  STAND-OFF  [STAND-OFF]  133.35,85.34 0 top
JP39  STAND-OFF  [STAND-OFF]  138.94,85.34 0 top
JP40  STAND-OFF  [STAND-OFF]  159.26,85.34 0 top
JP41  STAND-OFF  [STAND-OFF]  164.85,85.34 0 top
JP42  STAND-OFF  [STAND-OFF]  185.17,85.34 0 top
JP43  STAND-OFF  [STAND-OFF]  9.4,112.52 0 top
JP44  STAND-OFF  [STAND-OFF]  29.72,112.52 0 top
JP45  STAND-OFF  [STAND-OFF]  35.31,112.52 0 top
JP46  STAND-OFF  [STAND-OFF]  55.63,112.52 0 top
JP47  STAND-OFF  [STAND-OFF]  61.21,112.52 0 top
JP48  STAND-OFF  [STAND-OFF]  81.53,112.52 0 top
JP49  STAND-OFF  [STAND-OFF]  87.12,112.52 0 top
JP50  STAND-OFF  [STAND-OFF]  107.44,112.52 0 top
JP51  STAND-OFF  [STAND-OFF]  113.03,112.52 0 top
JP52  STAND-OFF  [STAND-OFF]  133.35,112.52 0 top
JP53  STAND-OFF  [STAND-OFF]  138.94,112.52 0 top
JP54  STAND-OFF  [STAND-OFF]  159.26,112.52 0 top
JP55  STAND-OFF  [STAND-OFF]  164.85,112.52 0 top
JP56  STAND-OFF  [STAND-OFF]  185.17,112.52 0 top
LOGO1  SFE_LOGO_FLAME.1_INCH  [SFE_LOGO_FLAME_.1]  29.72,9.4 0 top
LOGO2  OSHW-LOGOMINI  [OSHW-LOGO-MINI]  29.72,9.4 0 bottom
LOGO3  OSHW-LOGOMINI  [OSHW-LOGO-MINI]  55.63,9.4 0 bottom
LOGO4  SFE_LOGO_NAME_FLAME.1_INCH  [SFE_LOGO_NAME_FLAME_.1]  8.64,20.83 90 bottom
LOGO5  SFE_LOGO_NAME_FLAME.1_INCH  [SFE_LOGO_NAME_FLAME_.1]  34.54,20.83 90 bottom
LOGO6  SFE_LOGO_FLAME.1_INCH  [SFE_LOGO_FLAME_.1]  55.63,9.4 0 top
LOGO7  OSHW-LOGOMINI  [OSHW-LOGO-MINI]  81.53,9.4 0 bottom
LOGO8  SFE_LOGO_NAME_FLAME.1_INCH  [SFE_LOGO_NAME_FLAME_.1]  60.45,20.83 90 bottom
LOGO9  SFE_LOGO_FLAME.1_INCH  [SFE_LOGO_FLAME_.1]  81.53,9.4 0 top
LOGO10  OSHW-LOGOMINI  [OSHW-LOGO-MINI]  107.44,9.4 0 bottom
LOGO11  SFE_LOGO_NAME_FLAME.1_INCH  [SFE_LOGO_NAME_FLAME_.1]  86.36,20.83 90 bottom
LOGO12  SFE_LOGO_FLAME.1_INCH  [SFE_LOGO_FLAME_.1]  107.44,9.4 0 top
LOGO13  OSHW-LOGOMINI  [OSHW-LOGO-MINI]  133.35,9.4 0 bottom
LOGO14  SFE_LOGO_NAME_FLAME.1_INCH  [SFE_LOGO_NAME_FLAME_.1]  112.27,20.83 90 bottom
LOGO15  SFE_LOGO_FLAME.1_INCH  [SFE_LOGO_FLAME_.1]  133.35,9.4 0 top
LOGO16  OSHW-LOGOMINI  [OSHW-LOGO-MINI]  159.26,9.4 0 bottom
LOGO17  SFE_LOGO_NAME_FLAME.1_INCH  [SFE_LOGO_NAME_FLAME_.1]  138.18,20.83 90 bottom
LOGO18  SFE_LOGO_FLAME.1_INCH  [SFE_LOGO_FLAME_.1]  159.26,9.4 0 top
LOGO19  OSHW-LOGOMINI  [OSHW-LOGO-MINI]  185.17,9.4 0 bottom
LOGO20  SFE_LOGO_NAME_FLAME.1_INCH  [SFE_LOGO_NAME_FLAME_.1]  164.08,20.83 90 bottom
LOGO21  SFE_LOGO_FLAME.1_INCH  [SFE_LOGO_FLAME_.1]  185.17,9.4 0 top
LOGO22  OSHW-LOGOMINI  [OSHW-LOGO-MINI]  29.72,36.58 0 bottom
LOGO23  SFE_LOGO_NAME_FLAME.1_INCH  [SFE_LOGO_NAME_FLAME_.1]  8.64,48.01 90 bottom
LOGO24  SFE_LOGO_FLAME.1_INCH  [SFE_LOGO_FLAME_.1]  29.72,36.58 0 top
LOGO25  OSHW-LOGOMINI  [OSHW-LOGO-MINI]  55.63,36.58 0 bottom
LOGO26  SFE_LOGO_NAME_FLAME.1_INCH  [SFE_LOGO_NAME_FLAME_.1]  34.54,48.01 90 bottom
LOGO27  SFE_LOGO_FLAME.1_INCH  [SFE_LOGO_FLAME_.1]  55.63,36.58 0 top
LOGO28  OSHW-LOGOMINI  [OSHW-LOGO-MINI]  81.53,36.58 0 bottom
LOGO29  SFE_LOGO_NAME_FLAME.1_INCH  [SFE_LOGO_NAME_FLAME_.1]  60.45,48.01 90 bottom
LOGO30  SFE_LOGO_FLAME.1_INCH  [SFE_LOGO_FLAME_.1]  81.53,36.58 0 top
LOGO31  OSHW-LOGOMINI  [OSHW-LOGO-MINI]  107.44,36.58 0 bottom
LOGO32  SFE_LOGO_NAME_FLAME.1_INCH  [SFE_LOGO_NAME_FLAME_.1]  86.36,48.01 90 bottom
LOGO33  SFE_LOGO_FLAME.1_INCH  [SFE_LOGO_FLAME_.1]  107.44,36.58 0 top
LOGO34  OSHW-LOGOMINI  [OSHW-LOGO-MINI]  133.35,36.58 0 bottom
LOGO35  SFE_LOGO_NAME_FLAME.1_INCH  [SFE_LOGO_NAME_FLAME_.1]  112.27,48.01 90 bottom
LOGO36  SFE_LOGO_FLAME.1_INCH  [SFE_LOGO_FLAME_.1]  133.35,36.58 0 top
LOGO37  OSHW-LOGOMINI  [OSHW-LOGO-MINI]  159.26,36.58 0 bottom
LOGO38  SFE_LOGO_NAME_FLAME.1_INCH  [SFE_LOGO_NAME_FLAME_.1]  138.18,48.01 90 bottom
LOGO39  SFE_LOGO_FLAME.1_INCH  [SFE_LOGO_FLAME_.1]  159.26,36.58 0 top
LOGO40  OSHW-LOGOMINI  [OSHW-LOGO-MINI]  185.17,36.58 0 bottom
LOGO41  SFE_LOGO_NAME_FLAME.1_INCH  [SFE_LOGO_NAME_FLAME_.1]  164.08,48.01 90 bottom
LOGO42  SFE_LOGO_FLAME.1_INCH  [SFE_LOGO_FLAME_.1]  185.17,36.58 0 top
LOGO43  OSHW-LOGOMINI  [OSHW-LOGO-MINI]  29.72,63.75 0 bottom
LOGO44  SFE_LOGO_NAME_FLAME.1_INCH  [SFE_LOGO_NAME_FLAME_.1]  8.64,75.18 90 bottom
LOGO45  SFE_LOGO_FLAME.1_INCH  [SFE_LOGO_FLAME_.1]  29.72,63.75 0 top
LOGO46  OSHW-LOGOMINI  [OSHW-LOGO-MINI]  55.63,63.75 0 bottom
LOGO47  SFE_LOGO_NAME_FLAME.1_INCH  [SFE_LOGO_NAME_FLAME_.1]  34.54,75.18 90 bottom
LOGO48  SFE_LOGO_FLAME.1_INCH  [SFE_LOGO_FLAME_.1]  55.63,63.75 0 top
LOGO49  OSHW-LOGOMINI  [OSHW-LOGO-MINI]  81.53,63.75 0 bottom
LOGO50  SFE_LOGO_NAME_FLAME.1_INCH  [SFE_LOGO_NAME_FLAME_.1]  60.45,75.18 90 bottom
LOGO51  SFE_LOGO_FLAME.1_INCH  [SFE_LOGO_FLAME_.1]  81.53,63.75 0 top
LOGO52  OSHW-LOGOMINI  [OSHW-LOGO-MINI]  107.44,63.75 0 bottom
LOGO53  SFE_LOGO_NAME_FLAME.1_INCH  [SFE_LOGO_NAME_FLAME_.1]  86.36,75.18 90 bottom
LOGO54  SFE_LOGO_FLAME.1_INCH  [SFE_LOGO_FLAME_.1]  107.44,63.75 0 top
LOGO55  OSHW-LOGOMINI  [OSHW-LOGO-MINI]  133.35,63.75 0 bottom
LOGO56  SFE_LOGO_NAME_FLAME.1_INCH  [SFE_LOGO_NAME_FLAME_.1]  112.27,75.18 90 bottom
LOGO57  SFE_LOGO_FLAME.1_INCH  [SFE_LOGO_FLAME_.1]  133.35,63.75 0 top
LOGO58  OSHW-LOGOMINI  [OSHW-LOGO-MINI]  159.26,63.75 0 bottom
LOGO59  SFE_LOGO_NAME_FLAME.1_INCH  [SFE_LOGO_NAME_FLAME_.1]  138.18,75.18 90 bottom
LOGO60  SFE_LOGO_FLAME.1_INCH  [SFE_LOGO_FLAME_.1]  159.26,63.75 0 top
LOGO61  OSHW-LOGOMINI  [OSHW-LOGO-MINI]  185.17,63.75 0 bottom
LOGO62  SFE_LOGO_NAME_FLAME.1_INCH  [SFE_LOGO_NAME_FLAME_.1]  164.08,75.18 90 bottom
LOGO63  SFE_LOGO_FLAME.1_INCH  [SFE_LOGO_FLAME_.1]  185.17,63.75 0 top
LOGO64  OSHW-LOGOMINI  [OSHW-LOGO-MINI]  29.72,90.93 0 bottom
LOGO65  SFE_LOGO_NAME_FLAME.1_INCH  [SFE_LOGO_NAME_FLAME_.1]  8.64,102.36 90 bottom
LOGO66  SFE_LOGO_FLAME.1_INCH  [SFE_LOGO_FLAME_.1]  29.72,90.93 0 top
LOGO67  OSHW-LOGOMINI  [OSHW-LOGO-MINI]  55.63,90.93 0 bottom
LOGO68  SFE_LOGO_NAME_FLAME.1_INCH  [SFE_LOGO_NAME_FLAME_.1]  34.54,102.36 90 bottom
LOGO69  SFE_LOGO_FLAME.1_INCH  [SFE_LOGO_FLAME_.1]  55.63,90.93 0 top
LOGO70  OSHW-LOGOMINI  [OSHW-LOGO-MINI]  81.53,90.93 0 bottom
LOGO71  SFE_LOGO_NAME_FLAME.1_INCH  [SFE_LOGO_NAME_FLAME_.1]  60.45,102.36 90 bottom
LOGO72  SFE_LOGO_FLAME.1_INCH  [SFE_LOGO_FLAME_.1]  81.53,90.93 0 top
LOGO73  OSHW-LOGOMINI  [OSHW-LOGO-MINI]  107.44,90.93 0 bottom
LOGO74  SFE_LOGO_NAME_FLAME.1_INCH  [SFE_LOGO_NAME_FLAME_.1]  86.36,102.36 90 bottom
LOGO75  SFE_LOGO_FLAME.1_INCH  [SFE_LOGO_FLAME_.1]  107.44,90.93 0 top
LOGO76  OSHW-LOGOMINI  [OSHW-LOGO-MINI]  133.35,90.93 0 bottom
LOGO77  SFE_LOGO_NAME_FLAME.1_INCH  [SFE_LOGO_NAME_FLAME_.1]  112.27,102.36 90 bottom
LOGO78  SFE_LOGO_FLAME.1_INCH  [SFE_LOGO_FLAME_.1]  133.35,90.93 0 top
LOGO79  OSHW-LOGOMINI  [OSHW-LOGO-MINI]  159.26,90.93 0 bottom
LOGO80  SFE_LOGO_NAME_FLAME.1_INCH  [SFE_LOGO_NAME_FLAME_.1]  138.18,102.36 90 bottom
LOGO81  SFE_LOGO_FLAME.1_INCH  [SFE_LOGO_FLAME_.1]  159.26,90.93 0 top
LOGO82  OSHW-LOGOMINI  [OSHW-LOGO-MINI]  185.17,90.93 0 bottom
LOGO83  SFE_LOGO_NAME_FLAME.1_INCH  [SFE_LOGO_NAME_FLAME_.1]  164.08,102.36 90 bottom
LOGO84  SFE_LOGO_FLAME.1_INCH  [SFE_LOGO_FLAME_.1]  185.17,90.93 0 top
Q1  16MHZ  [RESONATOR-SMD]  25.91,25.91 0 top
Q2  16MHZ  [RESONATOR-SMD]  51.82,25.91 0 top
Q3  16MHZ  [RESONATOR-SMD]  77.72,25.91 0 top
Q4  16MHZ  [RESONATOR-SMD]  103.63,25.91 0 top
Q5  16MHZ  [RESONATOR-SMD]  129.54,25.91 0 top
Q6  16MHZ  [RESONATOR-SMD]  155.45,25.91 0 top
Q7  16MHZ  [RESONATOR-SMD]  181.36,25.91 0 top
Q8  16MHZ  [RESONATOR-SMD]  25.91,53.09 0 top
Q9  16MHZ  [RESONATOR-SMD]  51.82,53.09 0 top
Q10  16MHZ  [RESONATOR-SMD]  77.72,53.09 0 top
Q11  16MHZ  [RESONATOR-SMD]  103.63,53.09 0 top
Q12  16MHZ  [RESONATOR-SMD]  129.54,53.09 0 top
Q13  16MHZ  [RESONATOR-SMD]  155.45,53.09 0 top
Q14  16MHZ  [RESONATOR-SMD]  181.36,53.09 0 top
Q15  16MHZ  [RESONATOR-SMD]  25.91,80.26 0 top
Q16  16MHZ  [RESONATOR-SMD]  51.82,80.26 0 top
Q17  16MHZ  [RESONATOR-SMD]  77.72,80.26 0 top
Q18  16MHZ  [RESONATOR-SMD]  103.63,80.26 0 top
Q19  16MHZ  [RESONATOR-SMD]  129.54,80.26 0 top
Q20  16MHZ  [RESONATOR-SMD]  155.45,80.26 0 top
Q21  16MHZ  [RESONATOR-SMD]  181.36,80.26 0 top
Q22  16MHZ  [RESONATOR-SMD]  25.91,107.44 0 top
Q23  16MHZ  [RESONATOR-SMD]  51.82,107.44 0 top
Q24  16MHZ  [RESONATOR-SMD]  77.72,107.44 0 top
Q25  16MHZ  [RESONATOR-SMD]  103.63,107.44 0 top
Q26  16MHZ  [RESONATOR-SMD]  129.54,107.44 0 top
Q27  16MHZ  [RESONATOR-SMD]  155.45,107.44 0 top
Q28  16MHZ  [RESONATOR-SMD]  181.36,107.44 0 top
R1  1k  [0603]  24.64,28.45 0 top
R2  10k  [0603]  21.34,15.11 0 top
R3  10k  [0603]  9.4,27.18 0 bottom
R4  2.2k  [0603]  8.13,9.4 270 top
R5  2.2k  [0603]  13.21,9.4 270 top
R6  330  [0603]  14.48,28.45 180 top
R7  10k  [0603]  47.24,15.11 0 top
R8  330  [0603]  40.39,28.45 180 top
R9  1k  [0603]  50.55,28.45 0 top
R10  2.2k  [0603]  34.04,9.4 270 top
R11  2.2k  [0603]  39.12,9.4 270 top
R12  10k  [0603]  35.31,27.18 0 bottom
R13  10k  [0603]  73.15,15.11 0 top
R14  330  [0603]  66.29,28.45 180 top
R15  1k  [0603]  76.45,28.45 0 top
R16  2.2k  [0603]  59.94,9.4 270 top
R17  2.2k  [0603]  65.02,9.4 270 top
R18  10k  [0603]  61.21,27.18 0 bottom
R19  10k  [0603]  99.06,15.11 0 top
R20  330  [0603]  92.2,28.45 180 top
R21  1k  [0603]  102.36,28.45 0 top
R22  2.2k  [0603]  85.85,9.4 270 top
R23  2.2k  [0603]  90.93,9.4 270 top
R24  10k  [0603]  87.12,27.18 0 bottom
R25  10k  [0603]  124.97,15.11 0 top
R26  330  [0603]  118.11,28.45 180 top
R27  1k  [0603]  128.27,28.45 0 top
R28  2.2k  [0603]  111.76,9.4 270 top
R29  2.2k  [0603]  116.84,9.4 270 top
R30  10k  [0603]  113.03,27.18 0 bottom
R31  10k  [0603]  150.88,15.11 0 top
R32  330  [0603]  144.02,28.45 180 top
R33  1k  [0603]  154.18,28.45 0 top
R34  2.2k  [0603]  137.67,9.4 270 top
R35  2.2k  [0603]  142.75,9.4 270 top
R36  10k  [0603]  138.94,27.18 0 bottom
R37  10k  [0603]  176.78,15.11 0 top
R38  330  [0603]  169.93,28.45 180 top
R39  1k  [0603]  180.09,28.45 0 top
R40  2.2k  [0603]  163.58,9.4 270 top
R41  2.2k  [0603]  168.66,9.4 270 top
R42  10k  [0603]  164.85,27.18 0 bottom
R43  10k  [0603]  21.34,42.29 0 top
R44  330  [0603]  14.48,55.63 180 top
R45  1k  [0603]  24.64,55.63 0 top
R46  2.2k  [0603]  8.13,36.58 270 top
R47  2.2k  [0603]  13.21,36.58 270 top
R48  10k  [0603]  9.4,54.36 0 bottom
R49  10k  [0603]  47.24,42.29 0 top
R50  330  [0603]  40.39,55.63 180 top
R51  1k  [0603]  50.55,55.63 0 top
R52  2.2k  [0603]  34.04,36.58 270 top
R53  2.2k  [0603]  39.12,36.58 270 top
R54  10k  [0603]  35.31,54.36 0 bottom
R55  10k  [0603]  73.15,42.29 0 top
R56  330  [0603]  66.29,55.63 180 top
R57  1k  [0603]  76.45,55.63 0 top
R58  2.2k  [0603]  59.94,36.58 270 top
R59  2.2k  [0603]  65.02,36.58 270 top
R60  10k  [0603]  61.21,54.36 0 bottom
R61  10k  [0603]  99.06,42.29 0 top
R62  330  [0603]  92.2,55.63 180 top
R63  1k  [0603]  102.36,55.63 0 top
R64  2.2k  [0603]  85.85,36.58 270 top
R65  2.2k  [0603]  90.93,36.58 270 top
R66  10k  [0603]  87.12,54.36 0 bottom
R67  10k  [0603]  124.97,42.29 0 top
R68  330  [0603]  118.11,55.63 180 top
R69  1k  [0603]  128.27,55.63 0 top
R70  2.2k  [0603]  111.76,36.58 270 top
R71  2.2k  [0603]  116.84,36.58 270 top
R72  10k  [0603]  113.03,54.36 0 bottom
R73  10k  [0603]  150.88,42.29 0 top
R74  330  [0603]  144.02,55.63 180 top
R75  1k  [0603]  154.18,55.63 0 top
R76  2.2k  [0603]  137.67,36.58 270 top
R77  2.2k  [0603]  142.75,36.58 270 top
R78  10k  [0603]  138.94,54.36 0 bottom
R79  10k  [0603]  176.78,42.29 0 top
R80  330  [0603]  169.93,55.63 180 top
R81  1k  [0603]  180.09,55.63 0 top
R82  2.2k  [0603]  163.58,36.58 270 top
R83  2.2k  [0603]  168.66,36.58 270 top
R84  10k  [0603]  164.85,54.36 0 bottom
R85  10k  [0603]  21.34,69.47 0 top
R86  330  [0603]  14.48,82.8 180 top
R87  1k  [0603]  24.64,82.8 0 top
R88  2.2k  [0603]  8.13,63.75 270 top
R89  2.2k  [0603]  13.21,63.75 270 top
R90  10k  [0603]  9.4,81.53 0 bottom
R91  10k  [0603]  47.24,69.47 0 top
R92  330  [0603]  40.39,82.8 180 top
R93  1k  [0603]  50.55,82.8 0 top
R94  2.2k  [0603]  34.04,63.75 270 top
R95  2.2k  [0603]  39.12,63.75 270 top
R96  10k  [0603]  35.31,81.53 0 bottom
R97  10k  [0603]  73.15,69.47 0 top
R98  330  [0603]  66.29,82.8 180 top
R99  1k  [0603]  76.45,82.8 0 top
R100  2.2k  [0603]  59.94,63.75 270 top
R101  2.2k  [0603]  65.02,63.75 270 top
R102  10k  [0603]  61.21,81.53 0 bottom
R103  10k  [0603]  99.06,69.47 0 top
R104  330  [0603]  92.2,82.8 180 top
R105  1k  [0603]  102.36,82.8 0 top
R106  2.2k  [0603]  85.85,63.75 270 top
R107  2.2k  [0603]  90.93,63.75 270 top
R108  10k  [0603]  87.12,81.53 0 bottom
R109  10k  [0603]  124.97,69.47 0 top
R110  330  [0603]  118.11,82.8 180 top
R111  1k  [0603]  128.27,82.8 0 top
R112  2.2k  [0603]  111.76,63.75 270 top
R113  2.2k  [0603]  116.84,63.75 270 top
R114  10k  [0603]  113.03,81.53 0 bottom
R115  10k  [0603]  150.88,69.47 0 top
R116  330  [0603]  144.02,82.8 180 top
R117  1k  [0603]  154.18,82.8 0 top
R118  2.2k  [0603]  137.67,63.75 270 top
R119  2.2k  [0603]  142.75,63.75 270 top
R120  10k  [0603]  138.94,81.53 0 bottom
R121  10k  [0603]  176.78,69.47 0 top
R122  330  [0603]  169.93,82.8 180 top
R123  1k  [0603]  180.09,82.8 0 top
R124  2.2k  [0603]  163.58,63.75 270 top
R125  2.2k  [0603]  168.66,63.75 270 top
R126  10k  [0603]  164.85,81.53 0 bottom
R127  10k  [0603]  21.34,96.65 0 top
R128  330  [0603]  14.48,109.98 180 top
R129  1k  [0603]  24.64,109.98 0 top
R130  2.2k  [0603]  8.13,90.93 270 top
R131  2.2k  [0603]  13.21,90.93 270 top
R132  10k  [0603]  9.4,108.71 0 bottom
R133  10k  [0603]  47.24,96.65 0 top
R134  330  [0603]  40.39,109.98 180 top
R135  1k  [0603]  50.55,109.98 0 top
R136  2.2k  [0603]  34.04,90.93 270 top
R137  2.2k  [0603]  39.12,90.93 270 top
R138  10k  [0603]  35.31,108.71 0 bottom
R139  10k  [0603]  73.15,96.65 0 top
R140  330  [0603]  66.29,109.98 180 top
R141  1k  [0603]  76.45,109.98 0 top
R142  2.2k  [0603]  59.94,90.93 270 top
R143  2.2k  [0603]  65.02,90.93 270 top
R144  10k  [0603]  61.21,108.71 0 bottom
R145  10k  [0603]  99.06,96.65 0 top
R146  330  [0603]  92.2,109.98 180 top
R147  1k  [0603]  102.36,109.98 0 top
R148  2.2k  [0603]  85.85,90.93 270 top
R149  2.2k  [0603]  90.93,90.93 270 top
R150  10k  [0603]  87.12,108.71 0 bottom
R151  10k  [0603]  124.97,96.65 0 top
R152  330  [0603]  118.11,109.98 180 top
R153  1k  [0603]  128.27,109.98 0 top
R154  2.2k  [0603]  111.76,90.93 270 top
R155  2.2k  [0603]  116.84,90.93 270 top
R156  10k  [0603]  113.03,108.71 0 bottom
R157  10k  [0603]  150.88,96.65 0 top
R158  330  [0603]  144.02,109.98 180 top
R159  1k  [0603]  154.18,109.98 0 top
R160  2.2k  [0603]  137.67,90.93 270 top
R161  2.2k  [0603]  142.75,90.93 270 top
R162  10k  [0603]  138.94,108.71 0 bottom
R163  10k  [0603]  176.78,96.65 0 top
R164  330  [0603]  169.93,109.98 180 top
R165  1k  [0603]  180.09,109.98 0 top
R166  2.2k  [0603]  163.58,90.93 270 top
R167  2.2k  [0603]  168.66,90.93 270 top
R168  10k  [0603]  164.85,108.71 0 bottom
U1  ATMEGA328P  [TQFP32-08]  45.47,20.83 180 top
U2  ATMEGA328P  [TQFP32-08]  19.56,20.83 180 top
U3  ATMEGA328P  [TQFP32-08]  71.37,20.83 180 top
U4  ATMEGA328P  [TQFP32-08]  97.28,20.83 180 top
U5  ATMEGA328P  [TQFP32-08]  123.19,20.83 180 top
U6  ATMEGA328P  [TQFP32-08]  149.1,20.83 180 top
U7  ATMEGA328P  [TQFP32-08]  175.01,20.83 180 top
U8  ATMEGA328P  [TQFP32-08]  19.56,48.01 180 top
U9  ATMEGA328P  [TQFP32-08]  45.47,48.01 180 top
U10  ATMEGA328P  [TQFP32-08]  71.37,48.01 180 top
U11  ATMEGA328P  [TQFP32-08]  97.28,48.01 180 top
U12  ATMEGA328P  [TQFP32-08]  123.19,48.01 180 top
U13  ATMEGA328P  [TQFP32-08]  149.1,48.01 180 top
U14  ATMEGA328P  [TQFP32-08]  175.01,48.01 180 top
U15  ATMEGA328P  [TQFP32-08]  19.56,75.18 180 top
U16  ATMEGA328P  [TQFP32-08]  45.47,75.18 180 top
U17  ATMEGA328P  [TQFP32-08]  71.37,75.18 180 top
U18  ATMEGA328P  [TQFP32-08]  97.28,75.18 180 top
U19  ATMEGA328P  [TQFP32-08]  123.19,75.18 180 top
U20  ATMEGA328P  [TQFP32-08]  149.1,75.18 180 top
U21  ATMEGA328P  [TQFP32-08]  175.01,75.18 180 top
U22  ATMEGA328P  [TQFP32-08]  19.56,102.36 180 top
U23  ATMEGA328P  [TQFP32-08]  45.47,102.36 180 top
U24  ATMEGA328P  [TQFP32-08]  71.37,102.36 180 top
U25  ATMEGA328P  [TQFP32-08]  97.28,102.36 180 top
U26  ATMEGA328P  [TQFP32-08]  123.19,102.36 180 top
U27  ATMEGA328P  [TQFP32-08]  149.1,102.36 180 top
U28  ATMEGA328P  [TQFP32-08]  175.01,102.36 180 top
U$1  [3V3-03]  44.2,8.51 90 top
U$2  [GND-03]  41.66,8.51 90 top
U$3  [QWIIC-LOGO-SMALL]  29.72,20.83 0 bottom
U$4  [3V3-03]  18.29,8.51 90 top
U$5  [GND-03]  15.75,8.51 90 top
U$6  [3V30]  18.29,8.51 90 bottom
U$7  [ADR-()-03]  31.5,15.11 0 bottom
U$8  [I_SUPER2_C-()-03]  9.27,11.18 0 top
U$9  [PWR-()-03]  22.61,31.12 0 top
U$10  [BLK3]  27.56,15.11 0 bottom
U$11  [BOOT5]  11.18,11.05 90 bottom
U$12  [GRN4]  14.99,15.11 0 bottom
U$13  [SDA1]  20.83,8.64 90 bottom
U$14  [QWIIC7]  8.13,27.05 0 top
U$15  [SCL2]  23.37,8.64 90 bottom
U$16  [SDA1]  20.83,8.64 90 top
U$17  [STAT0]  12.57,31.12 0 top
U$18  [OPENLOG0]  6.48,25.4 0 top
U$19  [SCL2]  23.37,8.64 90 top
U$20  [GND1]  15.75,8.51 90 bottom
U$21  [ADR-()-03]  57.4,15.11 0 bottom
U$22  [I_SUPER2_C-()-03]  35.18,11.18 0 top
U$23  [PWR-()-03]  48.51,31.12 0 top
U$24  [BLK3]  53.47,15.11 0 bottom
U$25  [BOOT5]  37.08,11.05 90 bottom
U$26  [GRN4]  40.89,15.11 0 bottom
U$27  [QWIIC7]  34.04,27.05 0 top
U$28  [SCL2]  49.28,8.64 90 bottom
U$29  [SDA1]  46.74,8.64 90 top
U$30  [STAT0]  38.48,31.12 0 top
U$31  [OPENLOG0]  32.38,25.4 0 top
U$32  [SDA1]  46.74,8.64 90 bottom
U$33  [SCL2]  49.28,8.64 90 top
U$34  [3V30]  44.2,8.51 90 bottom
U$35  [GND1]  41.66,8.51 90 bottom
U$36  [QWIIC-LOGO-SMALL]  55.63,20.83 0 bottom
U$37  [3V3-03]  70.1,8.51 90 top
U$38  [GND-03]  67.56,8.51 90 top
U$39  [ADR-()-03]  83.31,15.11 0 bottom
U$40  [I_SUPER2_C-()-03]  61.09,11.18 0 top
U$41  [PWR-()-03]  74.42,31.12 0 top
U$42  [BLK3]  79.38,15.11 0 bottom
U$43  [BOOT5]  62.99,11.05 90 bottom
U$44  [GRN4]  66.8,15.11 0 bottom
U$45  [QWIIC7]  59.94,27.05 0 top
U$46  [SCL2]  75.18,8.64 90 bottom
U$47  [SDA1]  72.64,8.64 90 top
U$48  [STAT0]  64.39,31.12 0 top
U$49  [OPENLOG0]  58.29,25.4 0 top
U$50  [SDA1]  72.64,8.64 90 bottom
U$51  [SCL2]  75.18,8.64 90 top
U$52  [3V30]  70.1,8.51 90 bottom
U$53  [GND1]  67.56,8.51 90 bottom
U$54  [QWIIC-LOGO-SMALL]  81.53,20.83 0 bottom
U$55  [3V3-03]  96.01,8.51 90 top
U$56  [GND-03]  93.47,8.51 90 top
U$57  [ADR-()-03]  109.22,15.11 0 bottom
U$58  [I_SUPER2_C-()-03]  87,11.18 0 top
U$59  [PWR-()-03]  100.33,31.12 0 top
U$60  [BLK3]  105.28,15.11 0 bottom
U$61  [BOOT5]  88.9,11.05 90 bottom
U$62  [GRN4]  92.71,15.11 0 bottom
U$63  [QWIIC7]  85.85,27.05 0 top
U$64  [SCL2]  101.09,8.64 90 bottom
U$65  [SDA1]  98.55,8.64 90 top
U$66  [STAT0]  90.3,31.12 0 top
U$67  [OPENLOG0]  84.2,25.4 0 top
U$68  [SDA1]  98.55,8.64 90 bottom
U$69  [SCL2]  101.09,8.64 90 top
U$70  [3V30]  96.01,8.51 90 bottom
U$71  [GND1]  93.47,8.51 90 bottom
U$72  [QWIIC-LOGO-SMALL]  107.44,20.83 0 bottom
U$73  [3V3-03]  121.92,8.51 90 top
U$74  [GND-03]  119.38,8.51 90 top
U$75  [ADR-()-03]  135.13,15.11 0 bottom
U$76  [I_SUPER2_C-()-03]  112.9,11.18 0 top
U$77  [PWR-()-03]  126.24,31.12 0 top
U$78  [BLK3]  131.19,15.11 0 bottom
U$79  [BOOT5]  114.81,11.05 90 bottom
U$80  [GRN4]  118.62,15.11 0 bottom
U$81  [QWIIC7]  111.76,27.05 0 top
U$82  [SCL2]  127,8.64 90 bottom
U$83  [SDA1]  124.46,8.64 90 top
U$84  [STAT0]  116.2,31.12 0 top
U$85  [OPENLOG0]  110.11,25.4 0 top
U$86  [SDA1]  124.46,8.64 90 bottom
U$87  [SCL2]  127,8.64 90 top
U$88  [3V30]  121.92,8.51 90 bottom
U$89  [GND1]  119.38,8.51 90 bottom
U$90  [QWIIC-LOGO-SMALL]  133.35,20.83 0 bottom
U$91  [3V3-03]  147.83,8.51 90 top
U$92  [GND-03]  145.29,8.51 90 top
U$93  [ADR-()-03]  161.04,15.11 0 bottom
U$94  [I_SUPER2_C-()-03]  138.81,11.18 0 top
U$95  [PWR-()-03]  152.15,31.12 0 top
U$96  [BLK3]  157.1,15.11 0 bottom
U$97  [BOOT5]  140.72,11.05 90 bottom
U$98  [GRN4]  144.53,15.11 0 bottom
U$99  [QWIIC7]  137.67,27.05 0 top
U$100  [SCL2]  152.91,8.64 90 bottom
U$101  [SDA1]  150.37,8.64 90 top
U$102  [STAT0]  142.11,31.12 0 top
U$103  [OPENLOG0]  136.02,25.4 0 top
U$104  [SDA1]  150.37,8.64 90 bottom
U$105  [SCL2]  152.91,8.64 90 top
U$106  [3V30]  147.83,8.51 90 bottom
U$107  [GND1]  145.29,8.51 90 bottom
U$108  [QWIIC-LOGO-SMALL]  159.26,20.83 0 bottom
U$109  [3V3-03]  173.74,8.51 90 top
U$110  [GND-03]  171.2,8.51 90 top
U$111  [ADR-()-03]  186.94,15.11 0 bottom
U$112  [I_SUPER2_C-()-03]  164.72,11.18 0 top
U$113  [PWR-()-03]  178.05,31.12 0 top
U$114  [BLK3]  183.01,15.11 0 bottom
U$115  [BOOT5]  166.62,11.05 90 bottom
U$116  [GRN4]  170.43,15.11 0 bottom
U$117  [QWIIC7]  163.58,27.05 0 top
U$118  [SCL2]  178.82,8.64 90 bottom
U$119  [SDA1]  176.28,8.64 90 top
U$120  [STAT0]  168.02,31.12 0 top
U$121  [OPENLOG0]  161.93,25.4 0 top
U$122  [SDA1]  176.28,8.64 90 bottom
U$123  [SCL2]  178.82,8.64 90 top
U$124  [3V30]  173.74,8.51 90 bottom
U$125  [GND1]  171.2,8.51 90 bottom
U$126  [QWIIC-LOGO-SMALL]  185.17,20.83 0 bottom
U$127  [3V3-03]  18.29,35.69 90 top
U$128  [GND-03]  15.75,35.69 90 top
U$129  [ADR-()-03]  31.5,42.29 0 bottom
U$130  [I_SUPER2_C-()-03]  9.27,38.35 0 top
U$131  [PWR-()-03]  22.61,58.29 0 top
U$132  [BLK3]  27.56,42.29 0 bottom
U$133  [BOOT5]  11.18,38.23 90 bottom
U$134  [GRN4]  14.99,42.29 0 bottom
U$135  [QWIIC7]  8.13,54.23 0 top
U$136  [SCL2]  23.37,35.81 90 bottom
U$137  [SDA1]  20.83,35.81 90 top
U$138  [STAT0]  12.57,58.29 0 top
U$139  [OPENLOG0]  6.48,52.58 0 top
U$140  [SDA1]  20.83,35.81 90 bottom
U$141  [SCL2]  23.37,35.81 90 top
U$142  [3V30]  18.29,35.69 90 bottom
U$143  [GND1]  15.75,35.69 90 bottom
U$144  [QWIIC-LOGO-SMALL]  29.72,48.01 0 bottom
U$145  [3V3-03]  44.2,35.69 90 top
U$146  [GND-03]  41.66,35.69 90 top
U$147  [ADR-()-03]  57.4,42.29 0 bottom
U$148  [I_SUPER2_C-()-03]  35.18,38.35 0 top
U$149  [PWR-()-03]  48.51,58.29 0 top
U$150  [BLK3]  53.47,42.29 0 bottom